# Allegro board ether_ex_board_v001_1211.brd
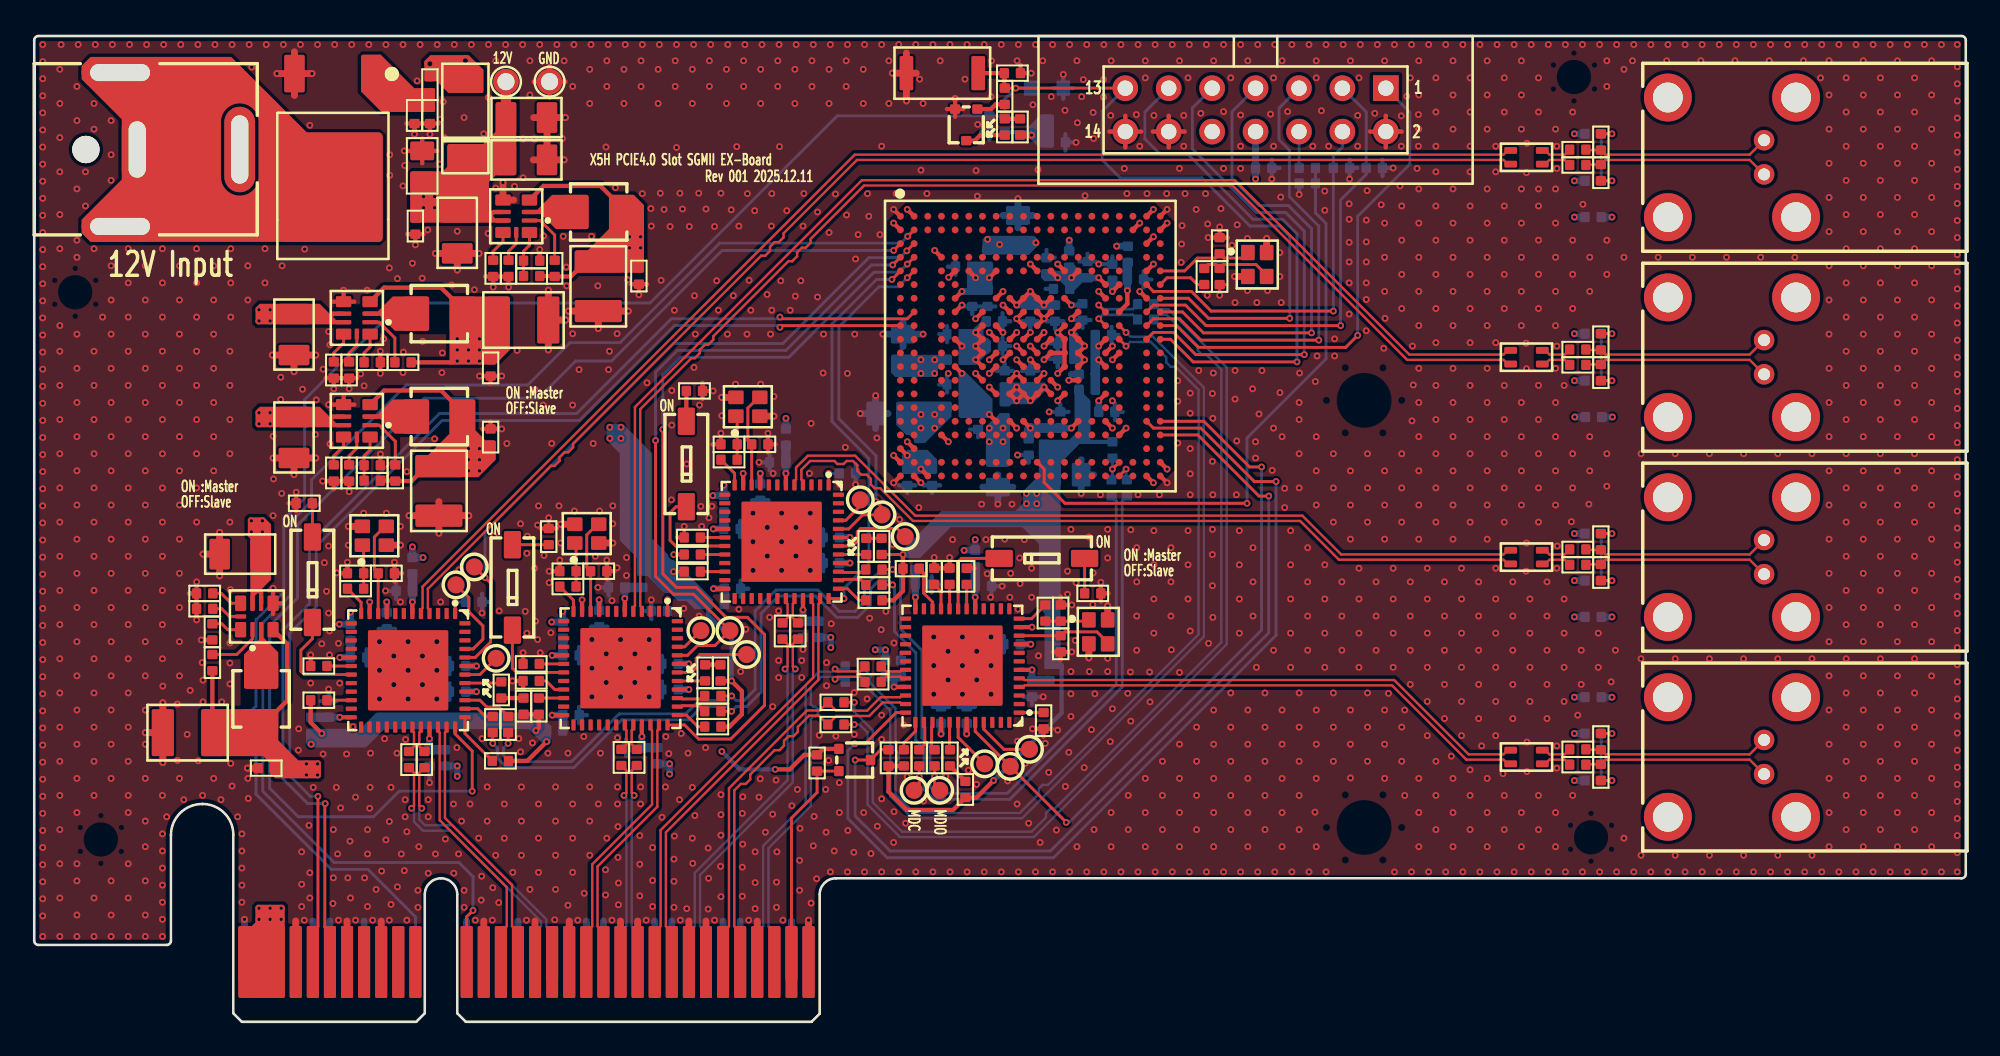
[diagram p0: board, top side]
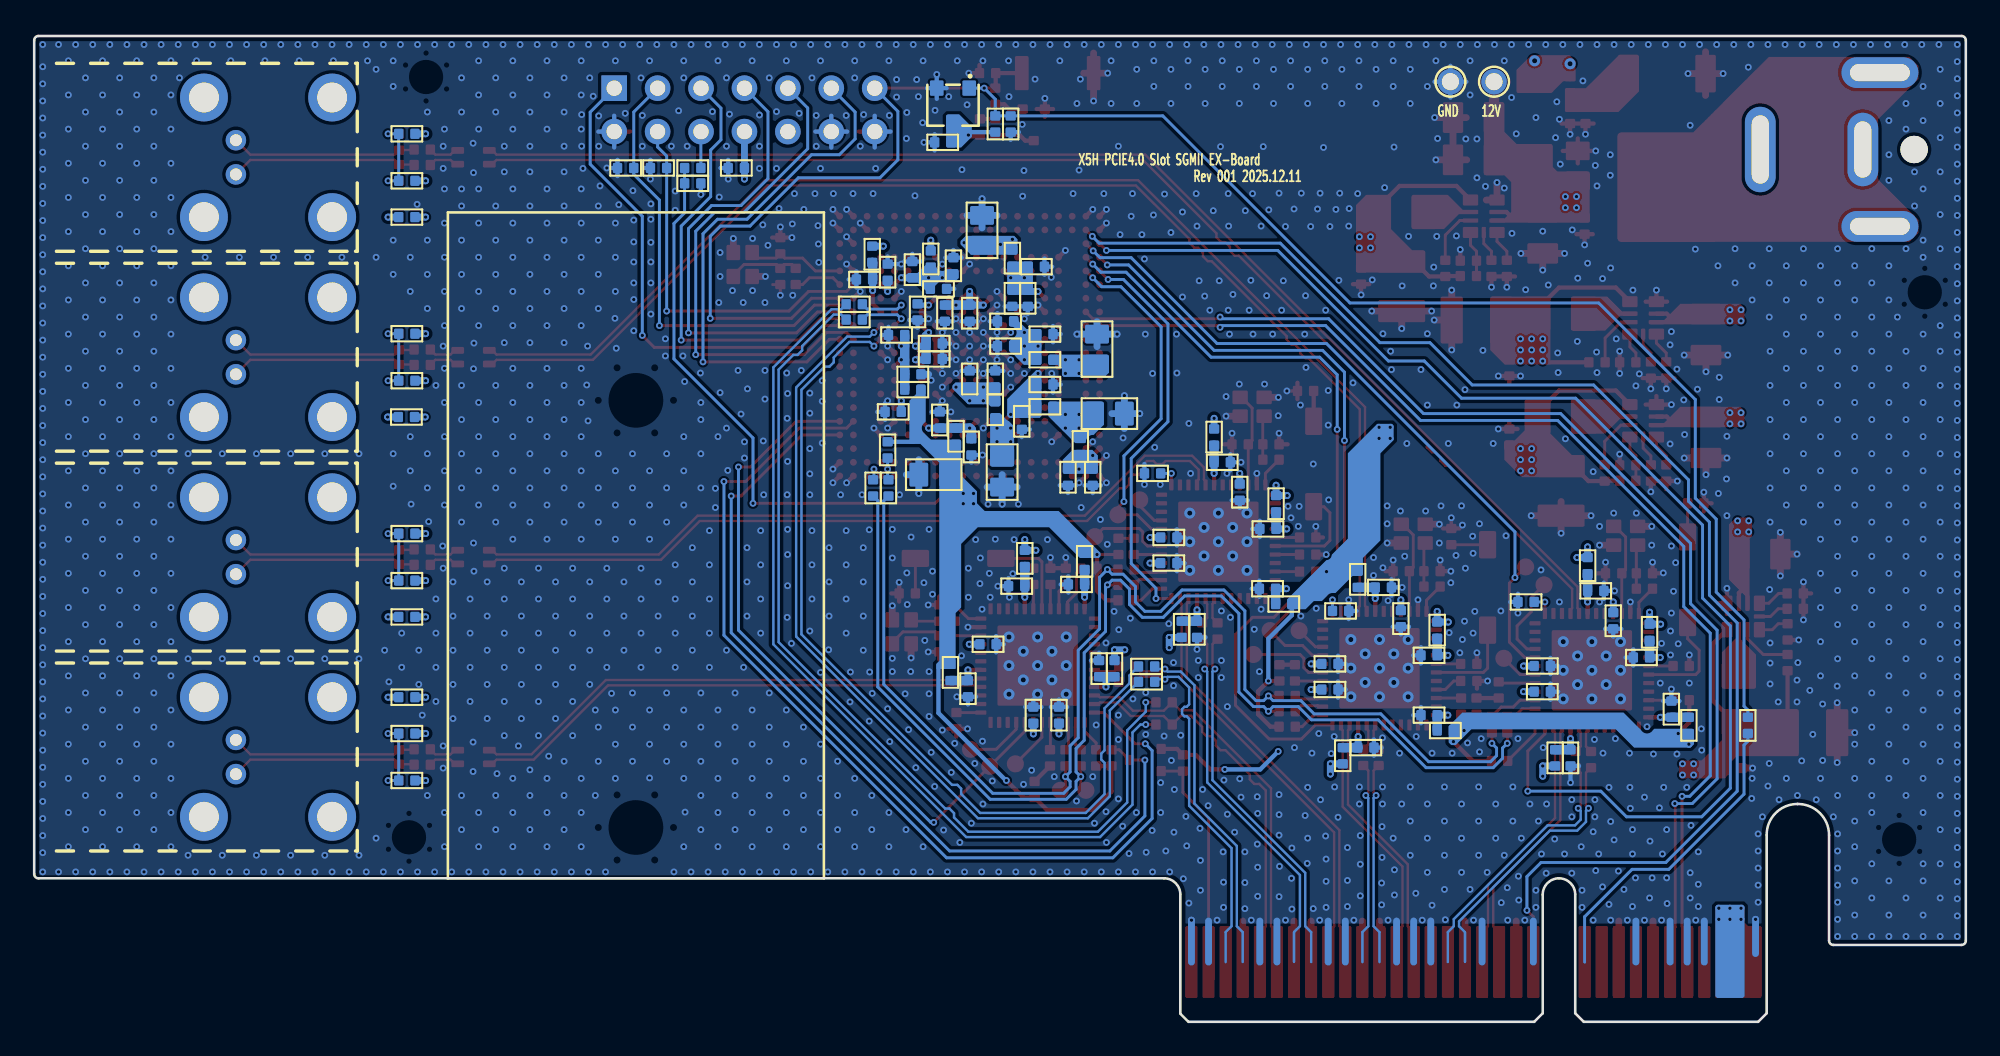
[diagram p1: board, bottom side, seen from below]

Outline 113 x 57.7 mm; copper layers: TOP, L2, L3, BOTTOM. Coordinates in mm from the lower left corner of the outline.
Outline path: 0,57.45 0,4.75 arc(0.07,4.57) 0.25,4.5 7.75,4.5 arc(7.93,4.57) 8,4.75 8,10.93 arc(8.53,12.22) 9.82,12.75 9.85,12.75 arc(11.12,12.22) 11.65,10.95 11.65,0.5 12.15,0 22.35,0 22.85,0.5 22.85,7.45 arc(23.13,8.12) 23.8,8.4 arc(24.47,8.12) 24.75,7.45 24.75,0.5 25.25,0 45.48,0 45.95,0.47 45.95,7.45 arc(46.23,8.12) 46.9,8.4 112.75,8.4 arc(112.93,8.47) 113,8.65 113,57.45 arc(112.93,57.63) 112.75,57.7 0.25,57.7 arc(0.07,57.63) 0,57.45

## Design rules (mm)
constraint set DEFAULT: min track width 0.17

## Placement (name value [footprint] x y rotation side)
B1  33  [CHIP1005]  53.88 38.75 0 bottom
B2  600  [CHIP1005]  60.55 44.65 90 bottom
B3  600  [CHIP1005]  53.88 36 180 bottom
B4  600  [CHIP1005]  59.08 34.27 270 bottom
B5  33  [CHIP1005]  56.77 35.83 90 bottom
B6  600  [CHIP1005]  55.77 44.7 90 bottom
B7  600  [CHIP1005]  61.6 37 180 bottom
B8  600  [CHIP1005]  51.8 33.67 90 bottom
B9  600  [CHIP1005]  22.12 26.7 270 bottom
B10  600  [CHIP1005]  24.02 15.45 270 bottom
B11  600  [CHIP1005]  16.2 17.35 90 bottom
B12  33  [CHIP1005]  18.5 22.8 90 bottom
B13  33  [CHIP1005]  91.2 47.1 180 bottom
B14  600  [CHIP1005]  35.58 25.9 270 bottom
B15  600  [CHIP1005]  36.45 15.57 270 bottom
B16  600  [CHIP1005]  30.45 17.05 0 bottom
B17  33  [CHIP1005]  30.93 22.93 90 bottom
B18  33  [CHIP1005]  91.22 35.4 180 bottom
B19  600  [CHIP1005]  43.98 34.23 270 bottom
B20  600  [CHIP1005]  45.88 22.98 270 bottom
B21  600  [CHIP1005]  39.9 24.45 0 bottom
B22  33  [CHIP1005]  40.35 30.32 90 bottom
B23  33  [CHIP1005]  91.2 23.7 180 bottom
B24  600  [CHIP1005]  59.4 20.45 270 bottom
B25  600  [CHIP1005]  49.8 20.68 90 bottom
B26  600  [CHIP1005]  51.55 26.95 270 bottom
B27  33  [CHIP1005]  55.05 27.12 90 bottom
B28  33  [CHIP1005]  91.2 19 180 bottom
B29  600  [CHIP1005]  63.98 44.92 90 bottom
C1  10uF  [CHIP2012]  50.83 39.38 270 bottom
C2  0.1uF  [CHIP1005]  58.27 41.48 270 bottom
C3  0.1uF  [CHIP1005]  56.17 39.55 0 bottom
C4  10uF  [CHIP2012]  50.1 35.6 0 bottom
C5  0.1uF  [CHIP1005]  59.73 41.48 270 bottom
C6  0.1uF  [CHIP1005]  53.88 40.25 180 bottom
C7  0.1uF  [CHIP1005]  56.17 41 0 bottom
C8  0.1uF  [CHIP1005]  53.88 37.3 180 bottom
C9  0.1uF  [CHIP1005]  55.23 35.15 270 bottom
C10  0.1uF  [CHIP1005]  61.62 44.02 90 bottom
C11  0.1uF  [CHIP1005]  60.1 42.9 180 bottom
C12  0.1uF  [CHIP1005]  59.23 44.25 90 bottom
C13  0.1uF  [CHIP1005]  58.17 33.65 270 bottom
C14  0.1uF  [CHIP1005]  60.02 35.23 90 bottom
C15  10uF  [CHIP2012]  57.55 46.33 270 bottom
C16  10uF  [CHIP2012]  56.38 32.17 90 bottom
C17  0.1uF  [CHIP1005]  60.35 38.8 180 bottom
C18  0.1uF  [CHIP1005]  58.27 37.62 90 bottom
C19  0.1uF  [CHIP1005]  56.77 37.62 90 bottom
C20  0.1uF  [CHIP1005]  54.38 44.2 180 bottom
C21  0.1uF  [CHIP1005]  55.77 42.35 270 bottom
C22  0.1uF  [CHIP1005]  54.88 42.35 270 bottom
C23  0.1uF  [CHIP1005]  62.75 35.7 0 bottom
C24  0.1uF  [CHIP1005]  60.35 39.7 180 bottom
C25  0.1uF  [CHIP1005]  64.42 43.45 0 bottom
C26  0.1uF  [CHIP1005]  61.6 37.9 180 bottom
C27  0.1uF  [CHIP1005]  62.55 40.2 0 bottom
C28  10uF  [CHIP2012]  60.38 32.02 180 bottom
C29  0.22uF  [CHIP1005]  61.33 41.55 90 bottom
C30  0.1uF  [CHIP1005]  51.08 31.88 270 bottom
C31  0.1uF  [CHIP1005]  52.52 31.88 270 bottom
C32  0.22uF  [CHIP1005]  63.08 43.88 270 bottom
C33  0.1uF  [CHIP1005]  71.92 49.98 0 bottom
C34  0.1uF  [CHIP1005]  65.03 42 180 bottom
C35  0.1uF  [CHIP1005]  65.03 41.1 180 bottom
C36  0.1uF  [CHIP1005]  57.23 55.52 0 top
C37  8pF  [CHIP1005]  69.35 45.42 270 top
C38  8pF  [CHIP1005]  69.35 43.62 90 top
C39  0.1uF  [CHIP1005]  21.65 25.23 180 bottom
C40  0.1uF  [CHIP1005]  23.12 15.45 270 bottom
C41  0.1uF  [CHIP1005]  20.62 23.48 270 bottom
C42  0.1uF  [CHIP1005]  24.77 19.32 180 bottom
C43  0.1uF  [CHIP1005]  17.23 18.3 90 bottom
C44  0.1uF  [CHIP1005]  18.98 21.32 0 bottom
C45  0.1uF  [CHIP1005]  24.77 20.82 180 bottom
C46  0.1uF  [CHIP1005]  22.82 15.35 90 top
C47  0.1uF  [CHIP1005]  90.3 50.15 0 top
C48  0.1uF  [CHIP1005]  21.93 15.35 90 top
C49  0.1uF  [CHIP1005]  90.3 51.05 0 top
C50  4.7nF  [CHIP1005]  91.2 49.23 180 bottom
C51  8pF  [CHIP1005]  18.8 26.25 0 top
C52  8pF  [CHIP1005]  20.6 26.25 180 top
C53  0.1uF  [CHIP1005]  34.08 25.43 180 bottom
C54  0.1uF  [CHIP1005]  35.1 16.05 180 bottom
C55  0.1uF  [CHIP1005]  37.2 19.45 180 bottom
C56  0.1uF  [CHIP1005]  33.05 23.6 270 bottom
C57  0.1uF  [CHIP1005]  31.4 17.95 0 bottom
C58  0.1uF  [CHIP1005]  31.4 21.45 0 bottom
C59  0.1uF  [CHIP1005]  37.2 20.95 180 bottom
C60  0.1uF  [CHIP1005]  35.25 15.47 90 top
C61  0.1uF  [CHIP1005]  34.35 15.47 90 top
C62  0.1uF  [CHIP1005]  90.3 38.45 0 top
C63  0.1uF  [CHIP1005]  90.3 39.35 0 top
C64  4.7nF  [CHIP1005]  91.2 37.52 180 bottom
C65  8pF  [CHIP1005]  31.23 26.38 0 top
C66  8pF  [CHIP1005]  33.02 26.38 180 top
C67  0.1uF  [CHIP1005]  43.5 32.75 180 bottom
C68  0.1uF  [CHIP1005]  44.98 22.98 270 bottom
C69  0.1uF  [CHIP1005]  42.48 31 270 bottom
C70  0.1uF  [CHIP1005]  40.85 25.35 0 bottom
C71  0.1uF  [CHIP1005]  46.62 26.85 180 bottom
C72  0.1uF  [CHIP1005]  40.83 28.85 0 bottom
C73  0.1uF  [CHIP1005]  46.62 28.35 180 bottom
C74  0.1uF  [CHIP1005]  44.67 22.88 90 top
C75  0.1uF  [CHIP1005]  43.77 22.88 90 top
C76  0.1uF  [CHIP1005]  90.3 26.75 0 top
C77  0.1uF  [CHIP1005]  90.3 27.65 0 top
C78  4.7nF  [CHIP1005]  91.2 28.57 180 bottom
C79  8pF  [CHIP1005]  40.65 33.8 0 top
C80  8pF  [CHIP1005]  42.45 33.8 180 top
C81  0.1uF  [CHIP1005]  58.38 19.5 270 bottom
C82  0.1uF  [CHIP1005]  50.7 20.68 90 bottom
C83  0.1uF  [CHIP1005]  57.2 22.1 180 bottom
C84  0.1uF  [CHIP1005]  52.02 25.6 0 bottom
C85  0.1uF  [CHIP1005]  53.05 17.95 90 bottom
C86  0.1uF  [CHIP1005]  55.52 25.5 0 bottom
C87  0.1uF  [CHIP1005]  54.55 17.95 90 bottom
C88  0.1uF  [CHIP1005]  49.08 19.9 0 top
C89  0.1uF  [CHIP1005]  90.3 15.05 0 top
C90  0.1uF  [CHIP1005]  49.08 20.8 0 top
C91  0.1uF  [CHIP1005]  90.3 15.95 0 top
C92  4.7nF  [CHIP1005]  91.2 14.12 180 bottom
C93  8pF  [CHIP1005]  60.05 23.93 270 top
C94  8pF  [CHIP1005]  60.05 22.12 90 top
C95  10uF  [CHIP3216]  28.8 52.92 0 top
C96  10uF  [CHIP3216]  28.8 50.45 0 top
C97  4.7uF  [CHIP2012]  22.7 50.1 90 top
C98  0.1uF  [CHIP1005]  22.3 46.58 270 top
C99  0.1uF  [CHIP1005]  22.25 53.05 270 top
C100  10uF  [CHIP3216]  15.2 40.23 270 top
C101  22uF  [CHIP3225]  28.62 41.08 0 top
C102  0.1uF  [CHIP1005]  26.7 38.27 270 top
C103  1nF*  [CHIP1005]  18.43 38.15 90 top
C104  10uF  [CHIP3216]  12.05 27.38 180 top
C105  22uF  [CHIP3225]  8.97 16.93 180 top
C106  0.1uF  [CHIP1005]  13.57 14.85 180 top
C107  1nF*  [CHIP1005]  9.97 24.18 0 top
C108  10uF  [CHIP3216]  24.75 46.17 270 top
C109  1nF  [CHIP1005]  27.75 44.1 90 top
C110  22uF  [CHIP3225]  33 43.05 270 top
C111  0.1uF  [CHIP1005]  35.38 43.65 270 top
C112  10uF  [CHIP3216]  15.2 34.2 270 top
C113  2.2nF  [CHIP1005]  18.43 32.12 90 top
C114  22uF  [CHIP3225]  23.68 31.07 270 top
C115  0.1uF  [CHIP1005]  26.7 34.23 90 top
C116  0.1uF  [CHIP1005]  59.85 51.48 0 bottom
CN1  Flash E1  [JTAG-E2_254H]  71.45 53.38 0 top
CN2  PCIE_X4_SLOT  [PCIEX4_CARD_FINGER]  8 4.5 0 top
CN3  E6S20A-40MT5-Z  [E6S20A-40MT5]  101.2 50.6 270 top
CN4  E6S20A-40MT5-Z  [E6S20A-40MT5]  101.2 38.9 270 top
CN5  E6S20A-40MT5-Z  [E6S20A-40MT5]  101.2 27.2 270 top
CN6  E6S20A-40MT5-Z  [E6S20A-40MT5]  101.2 15.5 270 top
CN7  -  [PJ-063AH]  6.03 51.06 180 top
D1  -  [PMEG3030EP]  25.23 52.88 90 top
L1  ACM2012H-900  [ACM2012H-900-2P-T03]  87.3 50.6 180 top
L2  ACM2012H-900  [ACM2012H-900-2P-T03]  87.3 38.9 180 top
L3  ACM2012H-900  [ACM2012H-900-2P-T03]  87.3 27.2 180 top
L4  ACM2012H-900  [ACM2012H-900-2P-T03]  87.3 15.5 180 top
L5  1.0uH  [IHLP1212BZ5A]  23.55 41.45 0 top
L6  1.0uH  [IHLP1212BZ5A]  13.28 19.05 270 top
L7  1.0uH  [IHLP1212BZ5A]  32.88 47.4 0 top
L8  1.0uH  [IHLP1212BZ5A]  23.55 35.42 0 top
LED1  Amber  [LED1005]  27.32 19.43 270 top
LED2  Amber  [LED1005]  39.25 20.43 90 top
LED3  Amber  [LED1005]  48.67 27.82 90 top
LED4  Amber  [LED1005]  53.58 15.45 270 top
LED5  Amber  [LED1005]  56.77 52.38 90 top
NOREF  -  []  11.65 -0.28 0 top
NOREF#2  -  []  -0.17 4.5 90 top
NOREF#3  -  []  24.75 -0.28 0 top
NOREF#4  -  []  23.8 0 90 top
NOREF#5  -  []  22.85 -0.08 0 top
NOREF#6  -  []  0 4.3 0 top
NOREF#7  -  []  45.95 7.25 0 top
NOREF#8  -  []  9.82 0 90 top
NOREF#9  -  []  47.17 0 90 top
NOREF#10  -  []  0 57.88 0 top
NOREF#11  -  []  8 -0.12 0 top
NOREF#12  -  []  113.2 8.4 90 top
Q1  -  [NX3008NBKW]  48 15.32 270 top
Q2  -  [IPD30N03S4L]  17.48 51.3 180 top
Q3  -  [NX3008NBKW]  54.52 52.5 180 top
R1  10K  [CHIP1005]  78.4 49.98 0 bottom
R2  10K  [CHIP1005]  56.77 52.55 90 bottom
R3  0*  [CHIP1005]  74.47 49.98 180 bottom
R4  4.7K  [CHIP1005]  63.08 33.48 270 bottom
R5  10K  [CHIP1005]  76.47 49.98 0 bottom
R6  10K  [CHIP1005]  74.47 49.08 180 bottom
R7  0  [CHIP1005]  68.45 43.62 270 top
R8  10K  [CHIP1005]  45.8 15.15 270 top
R9  10K  [CHIP1005]  49.98 15.45 90 top
R10  0  [CHIP1005]  27.73 17.4 270 top
R11  1K  [CHIP1005]  91.65 51.5 90 top
R12  1K  [CHIP1005]  91.65 49.7 270 top
R13  0  [CHIP1005]  26.82 17.4 270 top
R14  4.7K  [CHIP1005]  27.27 15.28 0 top
R15  100K  [CHIP1005]  91.2 51.98 180 bottom
R16  1K  [CHIP1005]  28.62 18.48 270 top
R17  4.7K  [CHIP1005]  16.65 18.82 0 top
R18  4.7K*  [CHIP1005]  16.65 20.82 0 top
R19  4.7K  [CHIP1005]  15.8 30.35 0 top
R20  0  [CHIP1005]  18.8 25.35 180 top
R21  4.99K  [CHIP1005]  25.73 24.57 0 bottom
R22  1K  [CHIP1005]  91.65 39.8 90 top
R23  1K  [CHIP1005]  91.65 38 270 top
R24  0  [CHIP1005]  39.7 19.07 0 top
R25  0  [CHIP1005]  39.7 18.18 0 top
R26  4.7K  [CHIP1005]  39.7 17.27 0 top
R27  100K  [CHIP1005]  91.2 40.27 180 bottom
R28  1K  [CHIP1005]  40.15 20.43 270 top
R29  4.7K  [CHIP1005]  29.52 18.48 90 top
R30  4.7K*  [CHIP1005]  29.07 20.95 0 top
R31  4.7K  [CHIP1005]  30.1 28.4 270 top
R32  4.7K  [CHIP1005]  29.07 19.95 0 top
R33  0  [CHIP1005]  31.23 25.48 180 top
R34  4.99K  [CHIP1005]  36.58 24.05 180 bottom
R35  1K  [CHIP1005]  91.65 28.1 90 top
R36  1K  [CHIP1005]  91.65 26.3 270 top
R37  0  [CHIP1005]  49.12 26.48 0 top
R38  0  [CHIP1005]  49.12 25.57 0 top
R39  4.7K  [CHIP1005]  49.12 24.68 0 top
R40  100K  [CHIP1005]  91.2 25.82 180 bottom
R41  1K  [CHIP1005]  49.58 27.82 270 top
R42  4.7K  [CHIP1005]  38.5 26.35 0 top
R43  4.7K*  [CHIP1005]  38.5 28.35 0 top
R44  4.7K  [CHIP1005]  38.62 36.92 180 top
R45  4.7K  [CHIP1005]  38.5 27.35 0 top
R46  0  [CHIP1005]  40.65 32.9 180 top
R47  4.99K  [CHIP1005]  47.58 32.1 0 bottom
R48  0  [CHIP1005]  52.67 15.45 270 top
R49  1K  [CHIP1005]  91.65 16.4 90 top
R50  1K  [CHIP1005]  91.65 14.6 270 top
R51  0  [CHIP1005]  51.77 15.45 270 top
R52  4.7K  [CHIP1005]  50.88 15.45 90 top
R53  1K  [CHIP1005]  54.48 13.6 270 top
R54  100K  [CHIP1005]  91.2 16.88 180 bottom
R55  4.7K  [CHIP1005]  51.3 26.52 0 top
R56  4.7K*  [CHIP1005]  54.55 26.07 270 top
R57  4.7K  [CHIP1005]  61.92 25.07 180 top
R58  4.7K  [CHIP1005]  53.55 26.07 270 top
R59  4.7K  [CHIP1005]  52.65 26.07 270 top
R60  0  [CHIP1005]  59.15 23.93 90 top
R61  4.99K  [CHIP1005]  59.05 17.62 270 top
R62  10K  [CHIP1005]  23.15 54.85 270 top
R63  47K  [CHIP1005]  23.15 53.05 270 top
R64  100.0K  [CHIP1005]  21.57 38.6 0 top
R65  40.2K  [CHIP1005]  17.52 38.15 90 top
R66  249.0K*  [CHIP1005]  19.77 38.6 0 top
R67  100.0K  [CHIP1005]  10.43 21.02 270 top
R68  40.2K  [CHIP1005]  9.97 25.07 0 top
R69  21.0K  [CHIP1005]  10.43 22.82 270 top
R70  82.0K  [CHIP1005]  29.1 43.65 180 top
R71  100.0K  [CHIP1005]  30.45 44.1 270 top
R72  7.15K  [CHIP1005]  26.85 44.1 90 top
R73  100.0K  [CHIP1005]  29.1 44.55 0 top
R74  49.9K  [CHIP1005]  19.77 31.68 180 top
R75  100.0K  [CHIP1005]  21.12 32.12 270 top
R76  7.15K  [CHIP1005]  17.52 32.12 90 top
R77  100.0K  [CHIP1005]  19.77 32.58 0 top
R78  1K  [CHIP1005]  57.67 52.38 270 top
R79  0  [CHIP1005]  56.77 54.17 90 top
R80  0  [CHIP1005]  63.02 31.25 270 bottom
R81  0  [CHIP1005]  63.92 31.25 270 bottom
R82  0*  [CHIP1005]  47.92 19.9 180 bottom
R83  0*  [CHIP1005]  47.92 20.8 180 bottom
R84  0*  [CHIP1005]  46.9 17.4 180 top
R85  0*  [CHIP1005]  46.9 18.7 180 top
R86  0*  [CHIP1005]  12.75 17.35 90 bottom
R87  100K*  [CHIP1005]  55.88 52.55 270 bottom
SW1  TACK  [SKRKAGE020]  53.12 55.52 180 top
SW2  -  [CHS-01A]  16.27 25.88 180 top
SW3  -  [CHS-01A]  27.98 25.43 180 top
SW4  -  [CHS-01A]  38.15 32.65 180 top
SW5  -  [CHS-01A]  58.95 27.12 90 top
TH1  TH  [TH100]  27.6 55.02 270 top
TH2  TH  [TH100]  30.15 55.02 270 top
TH3  TH  [MH_C560D320]  77.8 11.38 0 top
TH4  TH  [MH_C560D320]  77.8 36.38 0 top
TH5  TH  [MH_C350D200]  2.4 42.7 0 top
TH6  TH  [MH_C350D200]  3.9 10.68 0 top
TH7  TH  [MH_C350D200]  91.08 10.8 0 top
TH8  TH  [MH_C350D200]  90.08 55.3 0 top
TP1  TP  [TP100]  51.48 13.55 0 top
TP2  TP  [TP100]  52.98 13.55 0 top
TP3  TP  [TP100]  24.68 25.57 0 top
TP4  TP  [TP100]  27.02 21.27 0 top
TP5  TP  [TP100]  25.75 26.62 0 top
TP6  TP  [TP100]  39 22.9 90 top
TP7  TP  [TP100]  41.67 21.5 0 top
TP8  TP  [TP100]  40.7 22.9 90 top
TP9  TP  [TP100]  48.33 30.55 0 top
TP10  TP  [TP100]  50.95 28.4 0 top
TP11  TP  [TP100]  49.6 29.68 0 top
TP12  TP  [TP100]  57.1 14.95 0 top
TP13  TP  [TP100]  58.23 15.95 0 top
TP14  TP  [TP100]  55.6 15.1 0 top
U1  U2C_292P  [U2C8_292P_080P_040B]  58.27 39.55 0 top
U2  88Q2112  [88Q2112_48P]  21.88 20.57 180 top
U3  88Q2112  [88Q2112_48P]  34.3 20.7 180 top
U4  88Q2112  [88Q2112_48P]  43.73 28.1 180 top
U5  88Q2112  [88Q2112_48P]  54.3 20.85 90 top
U6  TPS62903  [TPS62903Q1]  18.88 41.2 180 top
U7  TPS62903  [TPS62903Q1]  13.03 23.73 90 top
U8  TPS62903  [TPS62903Q1]  28.2 47.15 180 top
U9  TPS62903  [TPS62903Q1]  18.88 35.17 180 top
U10  APX803S00  [APX810SR]  59.25 53.65 0 bottom
X1  20.000MHz  [XTAL4_CRS2016]  71.55 44.33 270 top
X2  25.000MHz  [XTAL4_CRS2016]  19.9 28.45 0 top
X3  25.000MHz  [XTAL4_CRS2016]  32.33 28.57 0 top
X4  25.000MHz  [XTAL4_CRS2016]  41.75 36 0 top
X5  25.000MHz  [XTAL4_CRS2016]  62.25 22.82 270 top

## Library data of the parts
B1-B29 = BEAD
C1-C116 = CAP NP
CN1 = Flash E1
CN2 = PCIE_X4_SLOT
CN3-CN6 = CONN 1x2P4SH
CN7 = CONN PJ-063AH
D1 = DIODE SBD
L1-L4 = IND CM2PA4P
L5-L8 = IND L
LED1-LED5 = LED
Q1 Q3 = MOS N ESD
Q2 = MOS NR
R1-R87 = RES R
SW1 = SW 2P
SW2-SW5 = SW1
TH1-TH8 = TH
TP1-TP14 = TP
U1 = U2C_292P
U2-U5 = 88Q2112_48p
U6-U9 = TPS62903-Q1
U10 = APX810SR
X1-X5 = XTAL 4P

## Footprints (pads in the part's own frame, mm; a bottom-side part is the same pattern mirrored in y, then rotated)
88Q2112_48P
  rrect 0.25x0.65 smd: 1(-2.75,-3.325) 2(-2.25,-3.325) 3(-1.75,-3.325) 4(-1.25,-3.325) 5(-0.75,-3.325) 6(-0.25,-3.325) 7(0.25,-3.325) 8(0.75,-3.325) 9(1.25,-3.325) 10(1.75,-3.325) 11(2.25,-3.325) 12(2.75,-3.325) 25(2.75,3.325) 26(2.25,3.325) 27(1.75,3.325) 28(1.25,3.325) 29(0.75,3.325) 30(0.25,3.325) 31(-0.25,3.325) 32(-0.75,3.325) 33(-1.25,3.325) 34(-1.75,3.325) 35(-2.25,3.325) 36(-2.75,3.325)
  rrect 0.65x0.25 smd: 13(3.325,-2.75) 14(3.325,-2.25) 15(3.325,-1.75) 16(3.325,-1.25) 17(3.325,-0.75) 18(3.325,-0.25) 19(3.325,0.25) 20(3.325,0.75) 21(3.325,1.25) 22(3.325,1.75) 23(3.325,2.25) 24(3.325,2.75) 37(-3.325,2.75) 38(-3.325,2.25) 39(-3.325,1.75) 40(-3.325,1.25) 41(-3.325,0.75) 42(-3.325,0.25) 43(-3.325,-0.25) 44(-3.325,-0.75) 45(-3.325,-1.25) 46(-3.325,-1.75) 47(-3.325,-2.25) 48(-3.325,-2.75)
  rrect 4.7x4.7 smd: 49(0,0)
ACM2012H-900-2P-T03
  rrect 0.75x0.4 smd: 1(-0.925,0.4) 2(-0.925,-0.4) 3(0.925,-0.4) 4(0.925,0.4)
APX810SR
  rrect 0.8x0.9 smd: 1(-0.95,-1) 2(0.95,-1) 3(0,1)
CHIP1005
  rrect 0.55x0.6 smd: 1(-0.475,0) 2(0.475,0)
CHIP2012
  rrect 1.1x1.4 smd: 1(-0.875,0) 2(0.875,0)
CHIP3216
  rrect 1.2x1.8 smd: 1(-1.2,0) 2(1.2,0)
CHIP3225
  rrect 1.3x2.75 smd: 1(-1.45,0) 2(1.45,0)
CHS-01A
  rrect 1x1.6 smd: 1(0,-2.5) 2(0,2.5)
E6S20A-40MT5
  round 1.2 hole 0.7: 1(1,0) 2(-1,0)
  round 2.8 hole 1.75: 3(3.5,1.87) 4(-3.5,1.87) 5(-3.5,-5.63) 6(3.5,-5.63)
IHLP1212BZ5A
  rrect 1.5x2 smd: 1(-1.2,0) 2(1.5,0)
IPD30N03S4L
  rrect 1.2x2.2 smd: 1(-2.25,-4.2) 3(2.25,-4.2)
  rrect 5.8x6.4 smd: 2(0,2.45)
JTAG-E2_254H
  rect 1.5x1.5 hole 0.9: 1(7.62,1.27)
  round 1.5 hole 0.9: 2(7.62,-1.27) 3(5.08,1.27) 4(5.08,-1.27) 5(2.54,1.27) 6(2.54,-1.27) 7(0,1.27) 8(0,-1.27) 9(-2.54,1.27) 10(-2.54,-1.27) 11(-5.08,1.27) 12(-5.08,-1.27) 13(-7.62,1.27) 14(-7.62,-1.27)
LED1005
  rrect 0.55x0.6 smd: 1(-0.475,0) 2(0.475,0)
MH_C350D200
  round 0 hole 0.3: 1(0,0)
MH_C560D320
  round 0 hole 0.4: 1(0,0)
NX3008NBKW
  rrect 0.6x0.55 smd: 1(-0.65,-0.925) 2(0.65,-0.925) 3(0,0.925)
PCIEX4_CARD_FINGER
  rrect 0.7x3.2 smd: A1(4.3,-0.5) B17(22.3,-0.5) B31(36.3,-0.5)
  rrect 0.7x4.2 smd: A2(5.3,-1) A3(6.3,-1) A4(7.3,-1) A5(8.3,-1) A6(9.3,-1) A7(10.3,-1) A8(11.3,-1) A9(12.3,-1) A10(13.3,-1) A11(14.3,-1) A12(17.3,-1) A13(18.3,-1) A14(19.3,-1) A15(20.3,-1) A16(21.3,-1) A17(22.3,-1) A18(23.3,-1) A19(24.3,-1) A20(25.3,-1) A21(26.3,-1) A22(27.3,-1) A23(28.3,-1) A24(29.3,-1) A25(30.3,-1) A26(31.3,-1) A27(32.3,-1) A28(33.3,-1) A29(34.3,-1) A30(35.3,-1) A31(36.3,-1) A32(37.3,-1) B1(4.3,-1) B2(5.3,-1) B3(6.3,-1) B4(7.3,-1) B5(8.3,-1) B6(9.3,-1) B7(10.3,-1) B8(11.3,-1) B9(12.3,-1) B10(13.3,-1) B11(14.3,-1) B12(17.3,-1) B13(18.3,-1) B14(19.3,-1) B15(20.3,-1) B16(21.3,-1) B18(23.3,-1) B19(24.3,-1) B20(25.3,-1) B21(26.3,-1) B22(27.3,-1) B23(28.3,-1) B24(29.3,-1) B25(30.3,-1) B26(31.3,-1) B27(32.3,-1) B28(33.3,-1) B29(34.3,-1) B30(35.3,-1) B32(37.3,-1)
PJ-063AH
  round 1.6 hole 1.6 unplated: (3,0)
  oval 1.8x5 hole 1x4: 1(-6,0)
  oval 1.8x4.3 hole 1x3.3: 2(0,0)
  oval 4.5x1.8 hole 3.5x1: 3(1,4.5) 4(1,-4.5)
PMEG3030EP
  rrect 1.4x2.1 smd: A(2.2,0) C(-2.2,0)
SKRKAGE020
  rrect 0.8x2 smd: 1(-2.1,0) 2(2.1,0)
TH100
  round 1.5 hole 1: 1(0,0)
TP100
  round 1 smd: 1(0,0)
TPS62903Q1
  rrect 0.9x0.25 smd: 1(-0.775,0.25) 2(-0.775,-0.25) 5(0.775,-0.25) 6(0.775,0.25)
  rrect 0.9x0.65 smd: 3(-0.775,-0.95) 4(0.775,-0.95) 7(0.775,0.95) 9(-0.775,0.95)
  rrect 0.25x0.65 smd: 8(0,0.95)
U2C8_292P_080P_040B
  round 0.4 smd: A1(-7.6,7.6) A2(-6.8,7.6) A3(-6,7.6) A4(-5.2,7.6) A5(-4.4,7.6) A6(-3.6,7.6) A7(-2.8,7.6) A8(-2,7.6) A9(-1.2,7.6) A10(-0.4,7.6) A11(0.4,7.6) A12(1.2,7.6) A13(2,7.6) A14(2.8,7.6) A15(3.6,7.6) A16(4.4,7.6) A17(5.2,7.6) A18(6,7.6) A19(6.8,7.6) A20(7.6,7.6) B1(-7.6,6.8) B2(-6.8,6.8) B3(-6,6.8) B4(-5.2,6.8) B5(-4.4,6.8) B6(-3.6,6.8) B7(-2.8,6.8) B8(-2,6.8) B9(-1.2,6.8) B10(-0.4,6.8) B11(0.4,6.8) B12(1.2,6.8) B13(2,6.8) B14(2.8,6.8) B15(3.6,6.8) B16(4.4,6.8) B17(5.2,6.8) B18(6,6.8) B19(6.8,6.8) B20(7.6,6.8) C1(-7.6,6) C2(-6.8,6) C19(6.8,6) C20(7.6,6) D1(-7.6,5.2) D2(-6.8,5.2) D4(-5.2,5.2) D5(-4.4,5.2) D6(-3.6,5.2) D7(-2.8,5.2) D8(-2,5.2) D9(-1.2,5.2) D10(-0.4,5.2) D11(0.4,5.2) D12(1.2,5.2) D13(2,5.2) D14(2.8,5.2) D15(3.6,5.2) D16(4.4,5.2) D17(5.2,5.2) D19(6.8,5.2) D20(7.6,5.2) E1(-7.6,4.4) E2(-6.8,4.4) E4(-5.2,4.4) E5(-4.4,4.4) E6(-3.6,4.4) E7(-2.8,4.4) E8(-2,4.4) E9(-1.2,4.4) E10(-0.4,4.4) E11(0.4,4.4) E12(1.2,4.4) E13(2,4.4) E14(2.8,4.4) E15(3.6,4.4) E16(4.4,4.4) E17(5.2,4.4) E19(6.8,4.4) E20(7.6,4.4) F1(-7.6,3.6) F2(-6.8,3.6) F4(-5.2,3.6) F5(-4.4,3.6) F16(4.4,3.6) F17(5.2,3.6) F19(6.8,3.6) F20(7.6,3.6) G1(-7.6,2.8) G2(-6.8,2.8) G4(-5.2,2.8) G5(-4.4,2.8) G8(-2,2.8) G9(-1.2,2.8) G10(-0.4,2.8) G11(0.4,2.8) G12(1.2,2.8) G13(2,2.8) G16(4.4,2.8) G17(5.2,2.8) G19(6.8,2.8) G20(7.6,2.8) H1(-7.6,2) H2(-6.8,2) H4(-5.2,2) H5(-4.4,2) H7(-2.8,2) H9(-1.2,2) H10(-0.4,2) H11(0.4,2) H12(1.2,2) H14(2.8,2) H16(4.4,2) H17(5.2,2) H19(6.8,2) H20(7.6,2) J1(-7.6,1.2) J2(-6.8,1.2) J4(-5.2,1.2) J5(-4.4,1.2) J7(-2.8,1.2) J8(-2,1.2) J10(-0.4,1.2) J11(0.4,1.2) J13(2,1.2) J14(2.8,1.2) J16(4.4,1.2) J17(5.2,1.2) J19(6.8,1.2) J20(7.6,1.2) K1(-7.6,0.4) K2(-6.8,0.4) K4(-5.2,0.4) K5(-4.4,0.4) K7(-2.8,0.4) K8(-2,0.4) K9(-1.2,0.4) K10(-0.4,0.4) K11(0.4,0.4) K12(1.2,0.4) K13(2,0.4) K14(2.8,0.4) K16(4.4,0.4) K17(5.2,0.4) K19(6.8,0.4) K20(7.6,0.4) L1(-7.6,-0.4) L2(-6.8,-0.4) L4(-5.2,-0.4) L5(-4.4,-0.4) L7(-2.8,-0.4) L8(-2,-0.4) L9(-1.2,-0.4) L10(-0.4,-0.4) L11(0.4,-0.4) L12(1.2,-0.4) L13(2,-0.4) L14(2.8,-0.4) L16(4.4,-0.4) L17(5.2,-0.4) L19(6.8,-0.4) L20(7.6,-0.4) M1(-7.6,-1.2) M2(-6.8,-1.2) M4(-5.2,-1.2) M5(-4.4,-1.2) M7(-2.8,-1.2) M8(-2,-1.2) M10(-0.4,-1.2) M11(0.4,-1.2) M13(2,-1.2) M14(2.8,-1.2) M16(4.4,-1.2) M17(5.2,-1.2) M19(6.8,-1.2) M20(7.6,-1.2) N1(-7.6,-2) N2(-6.8,-2) N4(-5.2,-2) N5(-4.4,-2) N7(-2.8,-2) N9(-1.2,-2) N10(-0.4,-2) N11(0.4,-2) N12(1.2,-2) N14(2.8,-2) N16(4.4,-2) N17(5.2,-2) N19(6.8,-2) N20(7.6,-2) P1(-7.6,-2.8) P2(-6.8,-2.8) P4(-5.2,-2.8) P5(-4.4,-2.8) P8(-2,-2.8) P9(-1.2,-2.8) P10(-0.4,-2.8) P11(0.4,-2.8) P12(1.2,-2.8) P13(2,-2.8) P16(4.4,-2.8) P17(5.2,-2.8) P19(6.8,-2.8) P20(7.6,-2.8) R1(-7.6,-3.6) R2(-6.8,-3.6) R4(-5.2,-3.6) R5(-4.4,-3.6) R16(4.4,-3.6) R17(5.2,-3.6) R19(6.8,-3.6) R20(7.6,-3.6) T1(-7.6,-4.4) T2(-6.8,-4.4) T4(-5.2,-4.4) T5(-4.4,-4.4) T6(-3.6,-4.4) T7(-2.8,-4.4) T8(-2,-4.4) T9(-1.2,-4.4) T10(-0.4,-4.4) T11(0.4,-4.4) T12(1.2,-4.4) T13(2,-4.4) T14(2.8,-4.4) T15(3.6,-4.4) T16(4.4,-4.4) T17(5.2,-4.4) T19(6.8,-4.4) T20(7.6,-4.4) U1(-7.6,-5.2) U2(-6.8,-5.2) U4(-5.2,-5.2) U5(-4.4,-5.2) U6(-3.6,-5.2) U7(-2.8,-5.2) U8(-2,-5.2) U9(-1.2,-5.2) U10(-0.4,-5.2) U11(0.4,-5.2) U12(1.2,-5.2) U13(2,-5.2) U14(2.8,-5.2) U15(3.6,-5.2) U16(4.4,-5.2) U17(5.2,-5.2) U19(6.8,-5.2) U20(7.6,-5.2) V1(-7.6,-6) V2(-6.8,-6) V19(6.8,-6) V20(7.6,-6) W1(-7.6,-6.8) W2(-6.8,-6.8) W3(-6,-6.8) W4(-5.2,-6.8) W5(-4.4,-6.8) W6(-3.6,-6.8) W7(-2.8,-6.8) W8(-2,-6.8) W9(-1.2,-6.8) W10(-0.4,-6.8) W11(0.4,-6.8) W12(1.2,-6.8) W13(2,-6.8) W14(2.8,-6.8) W15(3.6,-6.8) W16(4.4,-6.8) W17(5.2,-6.8) W18(6,-6.8) W19(6.8,-6.8) W20(7.6,-6.8) Y1(-7.6,-7.6) Y2(-6.8,-7.6) Y3(-6,-7.6) Y4(-5.2,-7.6) Y5(-4.4,-7.6) Y6(-3.6,-7.6) Y7(-2.8,-7.6) Y8(-2,-7.6) Y9(-1.2,-7.6) Y10(-0.4,-7.6) Y11(0.4,-7.6) Y12(1.2,-7.6) Y13(2,-7.6) Y14(2.8,-7.6) Y15(3.6,-7.6) Y16(4.4,-7.6) Y17(5.2,-7.6) Y18(6,-7.6) Y19(6.8,-7.6) Y20(7.6,-7.6)
XTAL4_CRS2016
  rrect 0.9x0.8 smd: 1(-0.7,-0.55) 2(0.7,-0.55) 3(0.7,0.55) 4(-0.7,0.55)

## Nets
12.0V: C95.1 C96.1 C97.1 C98.1 C100.1 C104.1 C108.1 C112.1 CN2.A2 CN2.A3 CN2.B1 CN2.B2 CN2.B3 D1.C(CATHODE) TH1.1(P1) U6.5 U6.6 U7.5 U7.6 U8.5 U8.6 U9.5 U9.6
A1VCC: B8.1 C30.1 C31.1 U1.V1 U1.Y3
D0.9V: B12.2 B17.2 B22.2 B27.2 C114.1 C115.1 L8.2(P2) R74.1 R75.2 U9.3(VOS)
D1.8V: B10.2 B15.2 B20.2 B25.2 C105.1 C106.1 L6.2(P2) Q1.1 R8.1 R67.2 U7.3(VOS)
D1.09V: B1.1 B5.1 C1.2 C16.2 C110.1 C111.1 L7.2(P2) R70.1 R71.2 U8.3(VOS)
D3.3V: B2.2 B3.2 B4.2 B6.2 B7.2 B8.2 B9.1 B11.1 B14.1 B16.1 B19.1 B21.1 B24.1 B26.1 B29.2 C4.2 C15.2 C28.2 C33.1 C101.1 C102.1 C116.1 CN1.8(VDD) L5.2(P2) R2.1 R4.1 R9.1 R14.2 R16.2 R17.1 R26.2 R28.2 R29.1 R39.2 R41.2 R42.1 R52.1 R53.2 R55.1 R64.2 R78.2 U6.3(VOS) U10.3(VCC)
GND: B13.2 B18.2 B23.2 B28.2 C1.1 C2.2 C3.2 C4.1 C5.2 C6.2 C7.2 C8.2 C9.2 C10.2 C11.2 C12.2 C13.2 C14.2 C15.1 C16.1 C17.2 C18.2 C19.2 C20.2 C21.2 C22.2 C23.2 C24.2 C25.2 C26.2 C27.2 C28.1 C29.1 C30.2 C31.2 C32.1 C33.2 C36.2 C37.1 C38.1 C39.2 C40.2 C41.2 C42.2 C43.2 C44.2 C45.2 C51.1 C52.1 C53.2 C54.2 C55.2 C56.2 C57.2 C58.2 C59.2 C65.1 C66.1 C67.2 C68.2 C69.2 C70.2 C71.2 C72.2 C73.2 C79.1 C80.1 C81.2 C82.2 C83.2 C84.2 C85.2 C86.2 C87.2 C93.1 C94.1 C95.2 C96.2 C97.2 C98.2 C99.2 C100.2 C101.2 C102.2 C103.1 C104.2 C105.2 C106.2 C107.1 C108.2 C109.1 C110.2 C111.2 C112.2 C113.1 C114.2 C115.2 C116.2 CN1.2 CN1.12 CN1.14 CN2.A1 CN2.A4 CN2.A5 CN2.A6 CN2.A8 CN2.A12 CN2.A15 CN2.A18 CN2.A19 CN2.A20 CN2.A23 CN2.A24 CN2.A27 CN2.A28 CN2.A31 CN2.A32 CN2.B4 CN2.B7 CN2.B9 CN2.B13 CN2.B16 CN2.B18 CN2.B21 CN2.B22 CN2.B25 CN2.B26 CN2.B29 CN2.B32 Q2.3(SOURCE) Q3.2(SOURCE) R1.2 R5.2 R6.2 R18.1 R19.1 R21.2 R30.1 R31.1 R32.1 R34.2 R43.1 R44.1 R45.1 R47.2 R56.1 R57.1 R58.1 R59.1 R61.2 R63.2 R65.1 R66.2 R68.1 R69.2 R72.1 R73.2 R76.1 R77.2 R87.2 SW1.2 TH2.1(P1) TH3.1(P1) TH4.1(P1) TH5.1(P1) TH6.1(P1) TH7.1(P1) TH8.1(P1) U1.A1 U1.A2 U1.A19 U1.A20 U1.B1 U1.B18 U1.B20 U1.C19 U1.D4 U1.E5 U1.E11 U1.E13 U1.E19 U1.G8 U1.G16 U1.G19 U1.H5 U1.H7 U1.H9 U1.H10 U1.H11 U1.H12 U1.H14 U1.J8 U1.J10 U1.J11 U1.J13 U1.K8 U1.K9 U1.K10 U1.K11 U1.K12 U1.K13 U1.L8 U1.L9 U1.L10 U1.L11 U1.L12 U1.L13 U1.L16 U1.L17 U1.M8 U1.M10 U1.M11 U1.M13 U1.N7 U1.N9 U1.N10 U1.N11 U1.N12 U1.N14 U1.P8 U1.P13 U1.T9 U1.T16 U1.U4 U1.U17 U1.V2 U1.W1 U1.W20 U1.Y1 U1.Y2 U1.Y19 U1.Y20 U2.11 U2.49 U3.11 U3.49 U4.11 U4.49 U5.11 U5.49 U6.4 U7.4 U8.4 U9.4 U10.2 X1.2 X1.4 X2.2 X2.4 X3.2 X3.4 X4.2 X4.4 X5.2 X5.4
PGND: CN7.2 CN7.3 CN7.4 Q2.2
PGND1: B13.1 C50.2 CN3.3 CN3.4 CN3.5 CN3.6 R15.2
PGND2: B18.1 C64.2 CN4.3 CN4.4 CN4.5 CN4.6 R27.2
PGND3: B23.1 C78.2 CN5.3 CN5.4 CN5.5 CN5.6 R40.2
PGND4: B28.1 C92.2 CN6.3 CN6.4 CN6.5 CN6.6 R54.2
VCC: B3.1 C8.1 C9.1 U1.M5 U1.T8
VDDP1: B1.2 C2.1 C3.1 C5.1 C6.1 C7.1 U1.G9 U1.G10 U1.G11 U1.G12 U1.J7 U1.K5 U1.K7 U1.L7 U1.M7
VDDP2: B5.2 C17.1 C18.1 C19.1 C23.1 C24.1 U1.J14 U1.K14 U1.L14 U1.M14 U1.P9(VDD_TH#P9) U1.P10 U1.P11 U1.P12 U1.P16
E0VCC: B4.1 C13.1 C14.1 U1.T10 U1.T14
E1VCC: B6.1 C20.1 C21.1 C22.1 U1.E6 U1.E8 U1.G5
ETH0BVCC: B7.1 C26.1 C27.1 U1.K16 U1.M16
ETH0PVCC: B29.1 C25.1 U1.H17
FLMD0: CN1.4 R5.1 U1.F19
FLMD1: R3.1 R6.1 U1.W11
I2C0_SCL_PCIE: CN2.B5 U1.J1
I2C0_SDA_PCIE: CN2.B6 U1.H2
MCU_MDC: R13.2 R25.2 R38.2 R51.2 R81.2 TP1.1
MCU_MDIO: R10.2 R24.2 R37.2 R48.2 R80.2 TP2.1
MCU_PHY1_RSTN: U1.C1 U2.36
MCU_PHY1_WAKE: TP5.1 U1.C2 U2.44
MCU_PHY2_RSTN: U1.D2 U3.36
MCU_PHY2_WAKE: TP8.1 U1.D1 U3.44
MCU_PHY3_RSTN: U1.E1 U4.36
MCU_PHY3_WAKE: TP11.1 U1.E2 U4.44
MCU_PHY4_RSTN: U1.T19 U5.36
MCU_PHY4_WAKE: TP12.1 U1.T20 U5.44
MCU_RX_DAT_N: R82.1 U1.J17
MCU_RX_DAT_P: R83.1 U1.K17
MCU_TX_DAT_N: C34.1 R84.1
MCU_TX_DAT_P: C35.1 R85.1
PCIE4_0_RX0_N: C46.1 CN2.A17
PCIE4_0_RX0_P: C48.1 CN2.A16
PCIE4_0_RX1_N: C60.1 CN2.A22
PCIE4_0_RX1_P: C61.1 CN2.A21
PCIE4_0_TX0_N: CN2.B15 U2.35
PCIE4_0_TX0_P: CN2.B14 U2.34
PCIE4_0_TX1_N: CN2.B20 U3.35
PCIE4_0_TX1_P: CN2.B19 U3.34
PCIE4_1_RX0_N: C74.1 CN2.A26
PCIE4_1_RX0_P: C75.1 CN2.A25
PCIE4_1_RX1_N: C88.1 CN2.A30 R82.2
PCIE4_1_RX1_P: C90.1 CN2.A29 R83.2
PCIE4_1_TX0_N: CN2.B24 U4.35
PCIE4_1_TX0_P: CN2.B23 U4.34
PCIE4_1_TX1_N: CN2.B28 R84.2 U5.35
PCIE4_1_TX1_P: CN2.B27 R85.2 U5.34
PCIE4_PRSNT_N_18: CN2.B31 Q1.2(SOURCE) R8.2
PCIE4_PRSNT_N_33: Q1.3 R9.2 U1.U20
PCIE40_CLKREQ_N_CN: CN2.B12 U1.B2
PHY1_RXD2: SW2.2(A2) U2.19
PHY2_RXD2: SW3.2(A2) U3.19
PHY3_RXD2: SW4.2(A2) U4.19
PHY4_RXD2: SW5.2(A2) U5.19
PRSNT2#: CN2.B17
RDY: CN1.11 U1.K20
RESET: C36.1 CN1.13 R2.2 R79.2 R86.2 R87.1 SW1.1 U1.G20 U10.1
SYSVCC: B2.1 C10.1 C11.1 C12.1 U1.E12 U1.E14 U1.F16
TCK: CN1.1 U1.J20
TDI: CN1.7 U1.H20
TDO: CN1.5 U1.J19
TMS: CN1.9 U1.K19
TRST: CN1.3 R1.1 U1.H19
VGS: C99.1 Q2.1 R62.2 R63.1
N13712279: C34.2 U1.H16
N13712333: C35.2 U1.J16
N13723640: C37.2 U1.E20 X1.1
N13723698: C38.2 R7.1 X1.3
N13725563: R7.2 U1.F20
N13752616: B9.2 C39.1 U2.6
N13752962: B11.2 C42.1 C43.1 U2.24 U2.40
N13757673: B10.1 C40.1 C41.1 U2.9 U2.33
N13758065: B12.1 C44.1 C45.1 U2.17 U2.43
N13764633: C50.1 R11.2 R12.2 R15.1
N13768715: C47.1 L1.1
N13768719: C49.1 L1.2
N13768723: C47.2 CN3.1 R12.1
N13768727: C49.2 CN3.2 R11.1
N13768751: L1.4 U2.4
N13768755: L1.3(OUT2) U2.5
N13841313: R19.2 SW2.1
N13907536: R21.1 U2.1
N13908311: C51.2 R20.1 X2.1
N13908323: R20.2 U2.12
N13908391: C52.2 U2.10(XTAL_OUT) X2.3
N14019476: C48.2 U2.31
N14019482: C46.2 U2.32
N14863994: L8.1 U9.2
N14864194: C113.2 U9.8
N14864198: R75.1 U9.1
N14864222: R74.2 R77.1 U9.9
N14864276: R76.2 U9.7
N14865717: L5.1 U6.2
N14865853: R64.1 U6.1
N14865915: R65.2 U6.7
N14866437: L6.1 U7.2
N14866573: R67.1 U7.1
N14866615: R69.1 U7.9
N14866635: R68.2 U7.7
N14869466: L7.1 U8.2
N14869666: C109.2 U8.8
N14869670: R71.1 U8.1
N14869698: R70.2 R73.1 U8.9
N14869752: R72.2 U8.7
N14871707: CN7.1 D1.A R62.1
N14920809: CN2.A11 R86.1
N14934403: CN1.6 R3.2
N15708059: C107.2 U7.8
N15708268: C103.2 U6.8
N15723104: C29.2 U1.G13
N15723331: C32.2 U1.F17
N15804615: R4.2 R80.1 U1.W17
N15812953: B14.2 C53.1 U3.6
N15812965: B15.1 C54.1 C56.1 U3.9 U3.33
N15813171: B16.2 C55.1 C57.1 U3.24 U3.40
N15813199: B17.1 C58.1 C59.1 U3.17 U3.43
N15813463: C60.2 U3.32
N15813467: L2.4 U3.4
N15813491: C62.1 L2.1
N15813495: C62.2 CN4.1 R23.1
N15813585: C61.2 U3.31
N15813589: L2.3(OUT2) U3.5
N15813593: C63.1 L2.2
N15813597: C63.2 CN4.2 R22.1
N15813759: C64.1 R22.2 R23.2 R27.1
N15814025: R30.2 U3.18
N15814165: C65.2 R33.1 X3.1
N15814177: R33.2 U3.12
N15814275: R34.1 U3.1
N15814287: C66.2 U3.10(XTAL_OUT) X3.3
N15818220: B19.2 C67.1 U4.6
N15818232: B20.1 C68.1 C69.1 U4.9 U4.33
N15818438: B21.2 C70.1 C71.1 U4.24 U4.40
N15818466: B22.1 C72.1 C73.1 U4.17 U4.43
N15818736: C74.2 U4.32
N15818740: L3.4 U4.4
N15818764: C76.1 L3.1
N15818768: C76.2 CN5.1 R36.1
N15818858: C75.2 U4.31
N15818862: L3.3(OUT2) U4.5
N15818866: C77.1 L3.2
N15818870: C77.2 CN5.2 R35.1
N15819032: C78.1 R35.2 R36.2 R40.1
N15819664: C79.2 R46.1 X4.1
N15819676: R46.2 U4.12
N15819872: R47.1 U4.1
N15819900: C80.2 U4.10(XTAL_OUT) X4.3
N15820170: B24.2 C81.1 U5.6
N15820182: B25.1 C82.1 C83.1 U5.9 U5.33
N15820398: B26.2 C84.1 C85.1 U5.24 U5.40
N15820422: B27.1 C86.1 C87.1 U5.17 U5.43
N15820680: C88.2 U5.32
N15820684: L4.4 U5.4
N15820708: C89.1 L4.1
N15820712: C89.2 CN6.1 R50.1
N15820802: C90.2 U5.31
N15820806: L4.3(OUT2) U5.5
N15820810: C91.1 L4.2
N15820814: C91.2 CN6.2 R49.1
N15820976: C92.1 R49.2 R50.2 R54.1
N15821382: C93.2 R60.1 X5.1
N15821394: R60.2 U5.12
N15821492: R61.1 U5.1
N15821504: C94.2 U5.10(XTAL_OUT) X5.3
N15876925: R24.1 U3.39
N15876963: R25.1 U3.38
N15877199: R26.1 U3.37
N15878857: LED2.1(CATHODE) U3.41
N15878861: LED2.2 R28.1
N15889738: R10.1 U2.39
N15889776: R13.1 U2.38
N15889904: R14.1 U2.37
N15890676: LED1.1(CATHODE) U2.41
N15890680: LED1.2 R16.1
N15890998: R37.1 U4.39
N15891036: R38.1 U4.38
N15891166: R39.1 U4.37
N15891671: LED3.1(CATHODE) U4.41
N15891675: LED3.2 R41.1
N15892157: R48.1 U5.39
N15892195: R51.1 U5.38
N15892325: R52.2 U5.37
N15892618: LED4.1(CATHODE) U5.41
N15892622: LED4.2 R53.1
N15893465: R17.2 U2.22
N15898773: R29.2 U3.22
N15901049: R18.2 U2.18
N15901801: R31.2 SW3.1
N15902204: R32.2 U3.21
N15903813: R42.2 U4.22
N15903821: R43.2 U4.18
N15903981: R55.2 U5.22
N15903989: R56.2 U5.18
N15904595: R45.2 U4.20
N15904719: R59.2 U5.21
N15904831: R58.2 U5.20
N15905664: R44.2 SW4.1
N15905885: R57.2 SW5.1
N15935905: R66.1 U6.9
N16037883: LED5.1(CATHODE) Q3.3
N16037887: LED5.2 R78.1
N16038991: Q3.1 R79.1
N16050014: R81.1 U1.Y17
N16050156: TP3.1 U2.45
N16050160: TP4.1 U2.42
N16050261: TP6.1 U3.45
N16050311: TP7.1 U3.42
N16050711: TP9.1 U4.45
N16050715: TP10.1 U4.42
N16050812: TP13.1 U5.45
N16050816: TP14.1 U5.42

Pads without a net: CN1 10; CN2 A7 A9 A10 A13 A14 B8 B10 B11 B30; U1 A3 A4 A5 A6 A7 A8 A9 A10 A11 A12 A13 A14 A15 A16 A17 A18 B3 B4 B5 B6 B7 B8 B9 B10 B11 B12 B13 B14 B15 B16 B17 B19 C20 D5 D6 D7 D8 D9 D10 D11 D12 D13 D14 D15 D16 D17 D19 D20 E4 E7 E9 E10 E15 E16 E17 F1 F2 F4 F5 G1 G2 G4 G17 H1 H4 J2 J4 J5 K1 K2 K4 L1 L2 L4 L5 L19 L20 M1 M2 M4 M17 M19 M20 N1 N2 N4 N5 N16 N17 N19 N20 P1 P2 P4 P5 P17 P19 P20 R1 R2 R4 R5 R16 R17 R19 R20 T1 T2 T4 T5 T6 T7 T11 T12 T13 T15 T17 U1 U2 U5 U6 U7 U8 U9 U10 U11 U12 U13 U14 U15 U16 U19 V19 V20 W2 W3 W4 W5 W6 W7 W8 W9 W10 W12 W13 W14 W15 W16 W18 W19 Y4 Y5 Y6 Y7 Y8 Y9 Y10 Y11 Y12 Y13 Y14 Y15 Y16 Y18; U2 2 3 7 8 13 14 15 16 20 21 23 25 26 27 28 29 30 46 47 48; U3 2 3 7 8 13 14 15 16 20 23 25 26 27 28 29 30 46 47 48; U4 2 3 7 8 13 14 15 16 21 23 25 26 27 28 29 30 46 47 48; U5 2 3 7 8 13 14 15 16 23 25 26 27 28 29 30 46 47 48

## Via types
v1: diameter 0.4, hole 0.2, TOP to BOTTOM, 2215 vias
v2: diameter 0.65, hole 0.3, TOP to BOTTOM, 54 vias

## Routing (per net, layer and track width the routed paths; a pad name or vN(x,y) marks a point on that pad's centre or on a via; arc(x,y) is an arc through that point)
12.0V: length 5.7
  TOP w0.25: 17.3,35.23 17.5,35.42 U9.5 ; 17.3,41.25 17.5,41.45 U6.5 ; U8.5 26.88,47.4 26.68,47.2 ; 13.07,25.3 13.28,25.1 U7.5
  TOP w0.6: TH1.1 C95.1 27.6,52.83
  vias: v1(12.7,29.32) v1(12.7,28.68) v1(13.15,41.67) v1(13.15,41.02) v1(13.15,35.65) v1(13.15,35) v1(13.15,6.65) v1(13.15,6) v1(13.35,29.32) v1(13.35,28.68) v1(13.8,41.67) v1(13.8,41.02) v1(13.8,35.65) v1(13.8,35) v1(13.8,6.65) v1(13.8,6) v1(14.45,6.65) v1(14.45,6) v1(22.77,48.3) v1(22.77,47.65) v1(23.43,48.3) v1(23.43,47.65)
A1VCC: length 1.1
  TOP w0.25: U1.Y3 v1(51.88,32.35) ; U1.V1 v1(51.08,33.15)
D0.9V: length 15.5
  TOP w0.25: L8.2 25.05,35.7 23.8,36.95 20.48,36.95 U9.3 ; C114.1 22.95,32.52 22.07,31.65 R75.2 21.1,31.68 R74.1
  BOTTOM w0.4: v1(30.93,24.02) B17.2 v1(30.27,23.4) ; v1(39.7,30.8) B22.2 v1(40.35,31.41) ; v1(54.4,27.6) B27.2 v1(55.05,28.23) ; v1(17.85,23.27) B12.2 v1(18.5,23.98)
  vias: v1(25.4,33.55) v1(25.4,32.9) v1(25.4,32.25) v1(26.05,33.55) v1(26.05,32.9) v1(26.05,32.25)
D1.8V: length 23.1
  TOP w0.25: Q1.1 46.15,15.97 R8.1 45.05,15.62 44.2,14.78 v1(43.35,14.78) ; L6.2 13.55,17.55 14.8,18.8 14.8,22.12 U7.3 ; R67.2 10.43,16.98
  BOTTOM w0.25: v1(43.35,14.78) 41.27,14.78 v1(40.23,15.82)
  BOTTOM w0.4: B20.2 v1(46.6,22.5) v1(46.6,21.9) ; B15.2 v1(37.17,15.1) v1(37.17,14.5) ; v1(49.2,21.77) v1(49.8,21.77) B25.2 ; B10.2 v1(24.75,14.97) v1(24.75,14.38)
  vias: v1(15.93,15.1) v1(15.93,14.45) v1(16.57,15.1) v1(16.57,14.45)
D1.09V: length 10.3
  TOP w0.25: 28.98,48.1 29.8,48.92 33.12,48.92 34.38,47.67 L7.2 ; C110.1 32.27,44.5 31.4,43.62 R71.2 30.43,43.65 R70.1
  vias: v1(34.83,45.95) v1(34.83,45.3) v1(35.48,45.95) v1(35.48,45.3) v1(51.88,38.75) v1(51.88,37.95) v1(52.67,38.75) v1(52.67,37.95) v1(55.88,34.75) v1(55.88,33.95) v1(56.67,34.75) v1(56.67,33.95)
D3.3V: length 69.2
  TOP w0.17: R41.2 v1(50.83,27.35)
  TOP w0.2: R42.1 v1(37.4,26.35)
  TOP w0.25: R39.2 50.27,24.68 50.83,25.23 R55.1 v1(50.83,27.35) ; v1(29.35,17.05) 29.52,17.23 R29.1 R16.2 ; R14.2 28.85,15.28 v1(29.98,16.4) ; R64.2 24.55,38.6 ; 16.18,18.82 16.18,17.52 v1(16.82,16.88) ; R52.1 R9.1 49.98,13.47 51.05,12.4 53.75,12.4 R53.2 55.12,13.12 v1(56.12,14.12) ; R26.2 40.67,17.27 41.4,18 41.4,19.35 v1(40.8,19.95) R28.2 ; U6.3 20.48,42.98 23.8,42.98 25.05,41.73 L5.2
  TOP w0.4: v1(58.35,51.9) R78.2
  L3 w0.4: v1(71.45,49.33) 63.3,49.33
  BOTTOM w0.25: B21.1 39.42,23.8 40.8,22.43 v1(40.8,19.95) ; 60.1,20.85 60.1,18.07 56.15,14.12 v1(56.12,14.12) ; R4.1 61.55,33.95 ; 56.77,52.08 58.27,52.08
  BOTTOM w0.4: v1(16.82,16.88) B11.1 v1(16.2,16.25) ; v1(29.98,16.4) 29.98,17.05 v1(29.35,17.05) ; B29.2 v1(63.33,45.4) ; v1(22.12,27.8) B9.1 v1(22.75,27.18) ; CN1.8 C33.1 v1(71.45,49.33) ; B2.2 v1(60.55,45.75) ; B19.1 v1(43.98,35.33)
  vias: v1(24.75,39.98) v1(24.75,39.33) v1(24.75,38.67) v1(25.4,39.98) v1(25.4,39.33) v1(25.4,38.67) v1(26.05,39.98) v1(26.05,39.33) v1(26.05,38.67) v1(33.67,34.8) v1(33.67,34.15) v1(34.33,34.8) v1(34.33,34.15) v1(51.88,35.55) v1(51.88,34.75) v1(52.67,35.55) v1(52.67,34.75) v1(55.77,45.8) v1(56.48,45.5) v1(58.05,30.93) v1(58.05,30.32) v1(58.6,45.6) v1(58.65,30.93) v1(58.65,30.32)
GND: length 402.6
  TOP w0.17: 69.8,43.15 C38.1 v1(69.35,42.52)
  TOP w0.2: R44.1 v1(39.72,36.92) ; R31.1 v1(30.1,29.5) ; R43.1 v1(38.02,29)
  TOP w0.25: 59.05,16.7 R61.2 ; R61.2 v1(58.4,17.15) ; R61.2 59.53,17.15 ; 29.62,28.88 R31.1 30.58,28.88 ; R65.1 v1(17.52,37.05) ; R65.1 C103.1 ; R65.1 17.05,37.67 ; 28.6,19.5 R32.1 v1(27.98,19.95) ; R45.1 v1(37.42,27.35) ; U1.E19 v1(65.47,44.35) ; R73.2 v1(29.57,45.2) ; 53.4,53.42 Q3.2 ; Q3.2 v1(53.88,54.05) ; Q3.2 53.88,52.97 ; Q3.2 54.35,53.42 ; C103.1 v1(18.43,37.05) ; C103.1 18.9,37.67 ; 33.5,25.9 C66.1 ; C66.1 33.95,26.38 ; C66.1 v1(33.5,27.02) ; 22.7,50.25 C97.2 ; C97.2 23.58,50.98 ; C97.2 v1(21.65,50.98) ; C97.2 22.7,51.7 ; CN1.14 63.83,53.03 ; CN1.14 64.76,52.1 ; CN1.14 63.83,51.18 ; CN1.14 62.9,52.1 ; U1.H11 v1(59.08,41.15) ; v1(59.08,41.15) U1.J11 ; v1(59.08,41.15) U1.H12 ; 57.08,35.15 v1(57.48,34.75) ; 42.92,33.32 42.92,33.8 ; 42.92,33.8 v1(42.92,34.45) ; 42.92,33.8 43.38,33.8 ; 16.18,20.82 v1(16.18,21.48) ; U1.B1 v1(50.27,46.75) ; U1.G16 v1(62.27,42.75) ; C98.2 v1(22.3,45.48) ; C98.2 22.78,46.1 ; C98.2 21.82,46.1 ; R72.1 C109.1 v1(27.75,43) ; R72.1 v1(26.85,43) ; R72.1 26.38,43.62 ; R57.1 62.85,25.07 ; R57.1 v1(62.4,25.73) ; R57.1 62.4,24.6 ; 26.7,37.35 C102.2 ; C102.2 v1(26.05,37.8) ; C102.2 27.18,37.8 ; C37.1 v1(69.35,46.52) ; C37.1 68.87,45.9 ; C37.1 69.83,45.9 ; v1(18.32,26.9) C51.1 17.88,26.25 ; U9.4 v1(17.23,36.12) ; U9.4 18.1,36.63 ; U9.4 18.73,36.12 ; U1.E11 v1(58.27,44.35) ; U6.4 v1(18.1,42.83) ; U6.4 17.47,42.15 ; U6.4 18.73,42.15 ; 57.08,39.15 v1(56.67,38.75) ; 30.15,54.1 TH2.1 ; TH2.1 29.22,55.02 ; TH2.1 30.15,55.95 ; TH2.1 31.08,55.02 ; 59.57,21.65 C94.1 ; C94.1 v1(60.7,21.65) ; C94.1 60.05,21.2 ; U1.K8 v1(55.88,40.35) ; 9.05,25.07 R68.1 ; R68.1 C107.1 v1(9.5,23.52) ; R68.1 9.5,25.55 ; U1.J10 v1(57.48,41.15) U1.H10 ; C111.2 v1(35.38,42.55) ; C111.2 34.9,43.17 ; C111.2 35.85,43.17 ; R43.1 37.61,28.35 ; U1.B20 v1(66.28,46.75) ; 79.07,51.18 CN1.2 ; CN1.2 79.07,53.03 ; CN1.2 80,52.1 ; CN1.2 78.14,52.1 ; U1.P8 v1(55.88,37.15) ; U1.K12 v1(59.08,39.55) ; v1(30.75,27.02) C65.1 30.27,26.38 ; v1(53.55,27.18) R58.1 R59.1 v1(52.65,27.18) ; U1.L8 v1(55.88,38.75) ; U1.P13 v1(59.88,36.35) ; 22.25,52.58 23.15,52.58 ; 22.25,52.58 v1(22.25,51.95) ; 22.25,52.58 21.77,52.58 ; 23.15,52.58 v1(23.15,51.95) ; 23.15,52.58 23.65,52.58 ; U2.11 v1(19.62,24.57) ; U5.11 v1(58.38,23.1) ; CN1.12 66.37,53.03 ; CN1.12 66.37,51.18 ; CN1.12 65.44,52.1 ; CN1.12 67.3,52.1 ; U1.Y19 v1(65.47,31.55) ; U1.G8 v1(56.67,42.75) ; U1.T16 v1(63.08,34.75) ; U1.J8 v1(56.67,40.35) ; U1.M10 v1(57.48,38.75) ; U1.N7 v1(55.08,37.95) ; U1.L13 U1.K13 v1(59.88,40.35) U1.J13 ; U1.L13 U1.L12 v1(59.08,38.75) ; U1.L13 U1.M13 v1(59.88,37.95) ; C52.1 21.53,26.25 ; C52.1 v1(21.07,26.9) ; C52.1 21.07,25.77 ; R30.1 v1(28.6,21.6) ; U1.N11 v1(59.08,37.95) ; 60.05,24.9 C93.1 v1(60.7,24.4) ; C115.2 v1(27.35,34.7) ; C115.2 26.22,34.7 ; C115.2 26.7,35.15 ; 13.97,23.87 U7.4 ; U7.4 14.48,24.5 ; U7.4 v1(13.97,25.38) ; R76.1 C113.1 v1(18.43,31.02) ; R76.1 v1(16.88,31.65) ; R76.1 17.52,31.18 ; 57.08,37.55 v1(57.48,37.95) U1.N10 ; U1.M8 v1(55.88,37.95) ; 39.67,33.8 C79.1 v1(40.17,34.45) ; U1.L11 v1(58.27,39.55) ; U1.W1 v1(50.27,33.15) ; U1.C19 v1(65.47,45.95) ; 53.9,43.98 U1.E5 v1(53.5,43.58) ; 53.08,34.35 v1(53.48,33.95) ; R77.2 v1(20.25,33.23) ; 39.1,37.4 R44.1 39.1,36.45 ; U1.W20 v1(66.28,32.35) ; v1(20.25,39.25) R66.2 20.25,38.1 ; 57.08,41.55 v1(56.67,41.95) ; 15.32,30.35 v1(15.32,31) ; 15.32,30.35 15.32,29.87 ; 15.32,30.35 14.87,30.35 ; 57.7,56 C36.2 v1(58.33,55.52) ; U1.Y2 v1(51.88,31.55) ; 53.08,44.75 v1(52.67,45.15) ; U1.A2 v1(51.08,47.55) ; U1.N12 v1(59.88,37.15) ; U1.L17 v1(63.08,38.75) ; U1.H5 v1(54.27,41.95) ; 57.08,39.95 v1(57.48,40.35) ; U1.E13 v1(59.88,44.35) ; U1.A1 v1(50.27,47.55) ; R69.2 v1(9.78,22.35) ; U1.G19 v1(64.67,42.75) ; U3.11 v1(32.05,24.7) ; U1.Y1 v1(50.27,31.55) ; U1.K11 v1(59.08,40.35) ; U1.B18 v1(64.67,46.75) ; U1.K10 v1(58.27,40.35) ; U1.Y20 v1(66.28,31.55) ; R56.1 55.02,26.55 ; 61.08,41.55 v1(60.67,41.15) ; U1.M11 v1(58.27,38.75) ; U1.A19 v1(65.47,47.55) ; U1.H7 v1(55.08,41.15) ; U1.L16 v1(63.08,39.55) ; U1.V2 v1(51.08,33.95) ; U1.A20 v1(66.28,47.55) ; U4.11 v1(41.48,32.1) ; U1.U17 v1(63.88,34.75) ; 61.08,37.55 v1(60.52,37.55) ; U1.L10 v1(57.48,39.55)
  TOP w0.4: C112.2 v1(15.2,32.02) ; C112.2 v1(13.97,33) ; C112.2 v1(16.48,33) ; C114.2 v1(25.43,29.62) ; C114.2 23.68,30.45 ; C114.2 v1(23.68,28.6) ; C114.2 v1(21.93,29.62) ; 72.1,45.02 v1(72.1,45.85) ; CN2.B16 29.3,5.9 ; 15.22,55.5 v1(14.2,55.5) ; 15.22,55.5 v1(16.25,55.5) ; 15.22,55.5 15.22,56.78 ; 15.22,55.5 15.22,54.22 ; C95.2 v1(31.07,52.92) ; C95.2 29.22,52.92 ; C95.2 C96.2 ; X1.2 v1(70.22,43.62) ; SW1.2 51.02,56.7 ; SW1.2 51.6,55.52 ; SW1.2 v1(50.2,55.52) ; SW1.2 v1(51.02,53.9) ; 33.02,28.02 v1(33.85,28.02) ; CN2.B7 18.3,5.9 ; CN2.B25 38.3,5.9 ; C105.2 v1(7.53,18.68) ; C105.2 v1(6.5,16.93) ; C105.2 v1(7.53,15.18) ; C104.2 v1(10.85,26.1) ; C104.2 v1(10.85,28.65) ; C104.2 v1(9.88,27.38) ; X2.4 v1(18.38,29) ; C96.2 v1(31,50.45) ; C96.2 29.2,50.45 ; CN2.B9 20.3,5.9 ; CN2.B26 39.3,5.9 ; CN2.B29 42.3,5.9 ; X5.4 v1(62.8,24.35) ; C100.2 v1(13.93,39.02) ; C100.2 v1(16.48,39.02) ; C100.2 v1(15.2,38.05) ; C101.2 v1(31.1,41.08) ; C101.2 v1(30.07,39.33) ; C101.2 v1(30.07,42.83) ; X4.2 v1(43.27,35.45) ; X4.4 v1(40.22,36.55) ; v1(27.43,49.12) U8.4 28.05,48.1 ; CN2.A32 v1(45.3,5.95) ; 24.75,44.98 v1(26.02,44.98) ; 24.75,44.98 v1(23.48,44.98) ; 24.75,44.98 v1(24.75,44) ; C106.2 v1(12.47,14.85) ; X5.2 v1(61.7,21.3) ; CN2.A18 31.3,5.9 ; CN2.A4 15.3,5.9 ; X2.2 v1(21.43,27.9) ; CN2.B22 35.3,5.9 ; CN2.B13 26.3,5.9 ; C110.2 v1(31.25,41.6) ; C110.2 v1(33,40.58) ; C110.2 v1(34.75,41.6) ; 31.62,29.12 v1(30.8,29.12) ; CN2.B21 34.3,5.9
  L2 w0.25: TH2.1 30.15,55.95 ; TH2.1 29.22,55.02 ; TH2.1 31.08,55.02 ; TH2.1 30.15,54.1 ; CN1.2 80,52.1 ; CN1.2 78.14,52.1 ; CN1.2 79.07,53.03 ; CN1.2 79.07,51.18 ; 65.44,52.1 CN1.12 ; CN1.12 66.37,51.18 ; CN1.12 67.3,52.1 ; CN1.12 66.37,53.03 ; CN1.14 64.76,52.1 ; CN1.14 62.9,52.1 ; CN1.14 63.83,53.03 ; CN1.14 63.83,51.18
  L3 w0.25: 78.14,52.1 CN1.2 ; CN1.2 79.07,53.03 ; CN1.2 79.07,51.18 ; CN1.2 80,52.1 ; 63.83,51.18 CN1.14 ; CN1.14 64.76,52.1 ; CN1.14 63.83,53.03 ; CN1.14 62.9,52.1 ; CN1.12 66.37,53.03 ; CN1.12 67.3,52.1 ; CN1.12 65.44,52.1 ; CN1.12 66.37,51.18 ; TH2.1 31.08,55.02 ; TH2.1 30.15,55.95 ; TH2.1 29.22,55.02 ; TH2.1 30.15,54.1
  L3 w0.4: v1(37.27,30.55) 36.92,30.2 ; v1(37.27,30.55) 37.6,30.23 ; v1(37.27,30.55) 37.27,30.3 ; 53.8,26.93 v1(53.55,27.18) 53.17,27.18 ; v1(21.07,26.9) 21.32,27.15 ; v1(21.07,26.9) 21.07,27.07 ; v1(21.07,26.9) 20.82,27.15 ; v1(52,40.25) 52.17,40.42 ; v1(52,40.25) 52,40.62 ; v1(52,40.25) 52.38,40.25 ; v1(23.12,14) 22.88,13.75 ; v1(23.12,14) 23.12,13.88 ; v1(23.12,14) 23.43,13.7 ; v1(37.3,34.92) 38.2,35.4
  BOTTOM w0.25: C18.2 58.75,38.1 ; C18.2 57.8,38.1 ; C18.2 58.27,38.55 ; 42.48,30.07 C69.2 ; C69.2 42,30.52 ; C69.2 42.95,30.52 ; 31.88,17.47 C57.2 ; C57.2 32.33,17.95 ; C57.2 31.88,18.43 ; 63.08,44.8 C32.1 v1(62.27,44.35) ; C8.2 53.4,37.88 v1(53.48,37.95) ; C8.2 53.4,36.82 ; C8.2 52.95,37.3 ; C58.2 31.88,21.93 ; C58.2 31.88,20.97 ; C58.2 32.33,21.45 ; R5.2 76.95,50.45 ; R5.2 v1(76.95,49.33) ; R5.2 77.4,49.98 ; C55.2 36.73,19.93 ; C55.2 36.27,19.45 ; C55.2 36.73,18.97 ; C33.2 72.85,49.98 ; C33.2 v1(72.4,49.33) ; C33.2 72.4,50.45 ; 33.05,22.67 C56.2 ; C56.2 32.57,23.12 ; C56.2 33.53,23.12 ; C31.2 53,31.4 ; C31.2 52.52,30.95 ; C31.2 52.05,31.4 ; C17.2 C24.2 ; C17.2 59.42,38.8 ; C17.2 59.88,38.32 ; C24.2 59.88,40.18 ; C24.2 59.42,39.7 ; CN1.14 63.83,53.03 ; CN1.14 63.83,51.18 ; CN1.14 62.9,52.1 ; C14.2 60.5,35.7 ; C14.2 v1(59.38,35.7) ; C14.2 60.02,36.15 ; C45.2 24.3,21.3 ; C45.2 24.3,20.35 ; C45.2 23.85,20.82 ; 56,25.02 C86.2 ; C86.2 v1(56.62,25.5) ; C86.2 56,25.98 ; 54.75,34.67 55.23,34.67 55.23,34.22 ; 58.17,32.73 58.17,33.17 v1(57.52,33.17) ; 51.18,21.15 C82.2 50.7,21.6 ; C23.2 63.23,36.2 v1(63.08,36.35) ; C23.2 63.23,35.22 ; C23.2 63.68,35.7 ; 52.57,18.43 C85.2 ; C85.2 53.53,18.43 ; C85.2 53.05,18.88 ; C43.2 17.7,18.77 ; C43.2 16.75,18.77 ; C43.2 v1(17.23,19.48) ; 35.65,24.05 R34.2 ; R34.2 v1(36.1,24.7) ; R34.2 36.1,23.57 ; C116.2 v1(60.95,51.48) ; C116.2 60.33,51 ; C116.2 60.33,51.95 ; 61.33,41.08 61.8,41.08 ; 61.33,41.08 60.85,41.08 ; 61.33,41.08 61.33,40.62 ; 59.62,54.65 U10.2 ; U10.2 60.2,54.02 ; U10.2 v1(60.2,55.45) ; U10.2 60.78,54.65 ; C19.2 56.77,38.55 ; C19.2 56.3,38.1 ; C19.2 57.25,38.1 ; 45.7,26.85 C71.2 ; C71.2 46.15,26.37 ; C71.2 46.15,27.33 ; 58.27,40.55 C2.2 ; C2.2 58.75,41 ; C2.2 57.8,41 ; C81.2 v1(59.02,19.02) ; C81.2 57.9,19.02 ; C81.2 58.38,18.57 ; 78.88,49.5 R1.2 ; R1.2 78.88,50.45 ; R1.2 v1(79.5,49.98) ; 23.85,19.32 C42.2 ; C42.2 24.3,19.8 ; C42.2 24.3,18.85 ; C27.2 63.44,40.2 ; C27.2 63.02,39.72 ; C27.2 63.02,40.68 ; 54.07,18.43 C87.2 ; C87.2 54.55,18.88 ; C87.2 55.03,18.43 ; C70.2 41.33,25.83 ; C70.2 41.78,25.35 ; C70.2 41.33,24.87 ; 41.3,28.37 C72.2 ; C72.2 41.75,28.85 ; C72.2 41.3,29.33 ; C83.2 56.73,22.58 ; C83.2 56.27,22.1 ; C83.2 56.73,21.62 ; 43.02,32.27 C67.2 ; C67.2 43.02,33.23 ; C67.2 v1(42.4,32.75) ; 53.9,43.72 C20.2 ; C20.2 53.45,44.2 ; C20.2 53.9,44.68 ; 19.45,20.85 C44.2 ; C44.2 19.9,21.32 ; C44.2 19.45,21.8 ; 59.73,40.55 C5.2 ; C5.2 59.25,41 ; C5.2 60.2,41 ; C7.2 56.65,41.48 ; C7.2 57.1,41 ; C7.2 56.65,40.52 ; 36.27,20.95 C59.2 ; C59.2 36.73,20.47 ; C59.2 36.73,21.43 ; C30.2 51.55,31.4 ; C30.2 50.6,31.4 ; C30.2 51.08,30.95 ; 54.4,41.88 C22.2 ; C22.2 54.88,41.42 ; C22.2 C21.2 56.23,41.88 ; 34.62,15.57 C54.2 ; C54.2 34.17,16.05 ; C54.2 34.62,16.53 ; 46.15,27.87 C73.2 ; C73.2 45.7,28.35 ; C73.2 46.15,28.83 ; v1(48.05,31.45) R47.2 48.05,32.65 ; v1(44.98,21.8) C68.2 44.48,22.5 ; C84.2 52.95,25.6 ; C84.2 52.5,25.12 ; C84.2 52.5,26.08 ; C25.2 65.35,43.45 ; C25.2 64.9,43.93 ; C25.2 64.9,42.97 ; CN1.12 67.3,52.1 ; CN1.12 65.44,52.1 ; CN1.12 66.37,53.03 ; CN1.12 66.37,51.18 ; C12.2 59.7,44.73 ; C12.2 58.75,44.73 ; C12.2 59.23,45.18 ; v1(23.12,14) C40.2 22.62,14.97 ; 53.4,39.77 C6.2 ; C6.2 53.4,40.73 ; C6.2 52.95,40.25 ; CN1.2 79.07,53.03 ; CN1.2 80,52.1 ; CN1.2 79.07,51.18 ; TH2.1 31.08,55.02 ; TH2.1 29.22,55.02 ; TH2.1 30.15,54.1 ; TH2.1 30.15,55.95 ; C3.2 56.65,40.03 ; C3.2 57.1,39.55 ; C3.2 56.65,39.07 ; 61.15,44.5 C10.2 ; C10.2 61.62,44.95 ; C10.2 62.1,44.5 ; 33.6,24.95 C53.2 ; C53.2 33.6,25.9 ; C53.2 v1(32.98,25.43) ; 20.15,23 C41.2 ; C41.2 20.62,22.55 ; C41.2 21.1,23 ; R21.2 26.65,24.57 ; R21.2 v1(26.2,23.93) ; R21.2 26.2,25.05 ; C11.2 59.17,42.9 ; 21.18,25.23 21.18,25.7 ; 21.18,25.23 21.18,24.75 ; 21.18,25.23 v1(20.55,25.23) ; R6.2 v1(74,48.42) ; 55.88,51.62 55.88,52.08 55.4,52.08
  BOTTOM w0.4: CN2.A31 44.3,5.9 ; CN2.A20 33.3,5.9 ; CN2.A15 28.3,5.9 ; C1.1 v1(52,40.25) ; C1.1 50.83,39.52 ; C1.1 50.83,40.98 ; C1.1 v1(49.65,40.25) ; CN2.A18 31.3,5.9 ; C4.1 49.95,35.6 ; C4.1 v1(48.33,35.6) ; C4.1 49.23,34.72 ; C4.1 v1(49.23,36.65) ; 90.72,47.1 v1(90.1,47.1) ; CN2.A5 16.3,5.9 ; C16.1 v1(56.38,30.3) ; C16.1 55.5,31.3 ; C16.1 57.25,31.3 ; C16.1 56.38,32.03 ; C15.1 57.55,46.47 ; C15.1 v1(57.55,48.17) ; C15.1 58.43,47.2 ; C15.1 56.67,47.2 ; CN2.A27 40.3,5.9 ; CN2.A1 v1(12.3,6) ; C28.1 61.98,32.02 ; C28.1 61.25,32.9 ; C28.1 v1(61.25,30.93) ; CN2.A12 25.3,5.9 ; CN2.A24 37.3,5.9 ; 90.72,19 v1(90.1,19) ; B18.2 v1(90.12,35.4) ; CN2.A23 36.3,5.9 ; CN2.A6 17.3,5.9 ; CN2.A19 32.3,5.9 ; CN2.A4 15.3,5.9 ; 90.72,23.7 v1(90.1,23.7) ; CN2.A28 41.3,5.9 ; C26.2 60.67,37.9 ; CN2.A32 v1(45.3,5.95) ; CN2.A8 19.3,5.9
  vias: v1(0.5,57.2) v1(0.5,56.2) v1(0.5,55.2) v1(0.5,54.2) v1(0.5,53.2) v1(0.5,52.2) v1(0.5,51.2) v1(0.5,50.2) v1(0.5,49.2) v1(0.5,48.2) v1(0.5,47.2) v1(0.5,46.2) v1(0.5,45.2) v1(0.5,44.2) v1(0.5,43.2) v1(0.5,42.2) v1(0.5,41.2) v1(0.5,40.2) v1(0.5,39.2) v1(0.5,38.2) v1(0.5,37.2) v1(0.5,36.2) v1(0.5,35.2) v1(0.5,34.2) v1(0.5,33.2) v1(0.5,32.2) v1(0.5,31.2) v1(0.5,30.2) v1(0.5,29.2) v1(0.5,28.2) v1(0.5,27.2) v1(0.5,26.2) v1(0.5,25.2) v1(0.5,24.2) v1(0.5,23.2) v1(0.5,22.2) v1(0.5,21.2) v1(0.5,20.2) v1(0.5,19.2) v1(0.5,18.2) v1(0.5,17.2) v1(0.5,16.2) v1(0.5,15.2) v1(0.5,14.2) v1(0.5,13.2) v1(0.5,12.2) v1(0.5,11.2) v1(0.5,10.2) v1(0.5,9.2) v1(0.5,8.2) v1(0.5,7.2) v1(0.5,6.2) v1(0.5,5) v1(1.5,55.75) v1(1.5,53.75) v1(1.5,51.75) v1(1.5,49.75) v1(1.5,47.25) v1(1.5,45.25) v1(1.5,40.75) v1(1.5,39.25) v1(1.5,37.25) v1(1.5,35.25) v1(1.5,33.25) v1(1.5,31.25) v1(1.5,29.25) v1(1.5,27.25) v1(1.5,25.25) v1(1.5,23.25) v1(1.5,21.25) v1(1.5,19.25) v1(1.5,17.25) v1(1.5,15.25) v1(1.5,13.25) v1(1.5,11.25) v1(1.5,9.25) v1(1.5,7.25) v1(1.5,5) v1(1.57,57.2) v1(2.5,54.75) v1(2.5,52.75) v1(2.5,48.75) v1(2.5,45.75) v1(2.5,44.75) v1(2.5,40.25) v1(2.5,38.25) v1(2.5,36.25) v1(2.5,34.25) v1(2.5,32.25) v1(2.5,30.25) v1(2.5,28.25) v1(2.5,26.25) v1(2.5,24.25) v1(2.5,22.25) v1(2.5,20.25) v1(2.5,18.25) v1(2.5,16.25) v1(2.5,14.25) v1(2.5,12.25) v1(2.5,9.25) v1(2.5,8.25) v1(2.5,6.25) v1(2.5,5) v1(2.58,57.2) v1(3,49.75) v1(3,47.75) v1(3.5,53.75) v1(3.5,52.25) v1(3.5,45.25) v1(3.5,39.25) v1(3.5,37.25) v1(3.5,35.25) v1(3.5,33.25) v1(3.5,31.25) v1(3.5,29.25) v1(3.5,27.25) v1(3.5,25.25) v1(3.5,23.25) v1(3.5,21.25) v1(3.5,19.25) v1(3.5,17.25) v1(3.5,15.25) v1(3.5,13.25) v1(3.5,7.25) v1(3.5,5) v1(3.58,57.2) v1(4,41.25) v1(4.5,52.75) v1(4.5,50.75) v1(4.5,49.25) v1(4.5,44.25) v1(4.5,42.25) v1(4.5,40.25) v1(4.5,38.25) v1(4.5,36.25) v1(4.5,34.25) v1(4.5,32.25) v1(4.5,30.25) v1(4.5,28.25) v1(4.5,26.25) v1(4.5,24.25) v1(4.5,22.25) v1(4.5,20.25) v1(4.5,18.25) v1(4.5,16.25) v1(4.5,14.25) v1(4.5,8.25) v1(4.5,6.25) v1(4.5,5) v1(4.58,57.2) v1(5.5,45.25) v1(5.5,43.25) v1(5.5,41.25) v1(5.5,39.25) v1(5.5,37.25) v1(5.5,35.25) v1(5.5,33.25) v1(5.5,31.25) v1(5.5,29.25) v1(5.5,27.25) v1(5.5,25.25) v1(5.5,23.25) v1(5.5,21.25) v1(5.5,19.25) v1(5.5,17.25) v1(5.5,15.25) v1(5.5,13.25) v1(5.5,12.25) v1(5.5,9.25) v1(5.5,7.25) v1(5.5,5) v1(5.58,57.2) v1(6.5,44.25) v1(6.5,42.25) v1(6.5,40.25) v1(6.5,38.25) v1(6.5,36.25) v1(6.5,34.25) v1(6.5,32.25) v1(6.5,30.25) v1(6.5,28.25) v1(6.5,26.25) v1(6.5,24.25) v1(6.5,22.25) v1(6.5,20.25) v1(6.5,18.25) v1(6.5,16.25) v1(6.5,14.25) v1(6.5,11.75) v1(6.5,10.25) v1(6.5,8.25) v1(6.5,6.25) v1(6.5,5) v1(6.58,57.2) v1(7.5,45.25) v1(7.5,43.25) v1(7.5,41.25) v1(7.5,39.25) v1(7.5,37.25) v1(7.5,35.25) v1(7.5,33.25) v1(7.5,31.25) v1(7.5,29.25) v1(7.5,27.25) v1(7.5,25.25) v1(7.5,23.25) v1(7.5,21.25) v1(7.53,19.65) v1(7.5,13.25) v1(7.5,11) v1(7.5,10) v1(7.5,9) v1(7.5,8) v1(7.5,7) v1(7.5,6) v1(7.5,5) v1(7.58,57.2) v1(7.75,12) v1(8.38,18.6) v1(8.38,15.3) v1(8.5,44.25) v1(8.5,42.25) v1(8.5,40.25) v1(8.5,38.25) v1(8.5,36.25) v1(8.5,34.25) v1(8.5,32.25) v1(8.5,30.25) v1(8.5,28.25) v1(8.5,26.25) v1(8.5,24.25) v1(8.5,22.25) v1(8.5,20.25) v1(8.5,14.25) v1(8.57,57.2) v1(8.75,13) v1(8.95,16.82) v1(9.12,19.4) v1(9.5,45.25) v1(9.5,43.25) v1(9.5,41.25) v1(9.5,39.25) v1(9.5,37.25) v1(9.5,35.25) v1(9.5,33.25) v1(9.5,31.25) v1(9.5,29.25) v1(9.5,25.75) v1(9.57,57.2) v1(9.6,15.28) v1(9.82,21.02) v1(9.85,13.25) v1(9.88,20) v1(9.88,18.73) v1(10.5,44.25) v1(10.5,42.25) v1(10.5,40.25) v1(10.5,38.25) v1(10.5,36.25) v1(10.5,34.25) v1(10.5,32.25) v1(10.5,30.25) v1(10.5,14.25) v1(10.57,57.2) v1(10.93,13) v1(10.97,18.73) v1(11.45,39.25) v1(11.45,37.25) v1(11.45,35.25) v1(11.45,33.25) v1(11.45,31.25) v1(11.45,29.25) v1(11.45,22.18) v1(11.45,21) v1(11.45,19.77) v1(11.5,45.25) v1(11.5,43.25) v1(11.5,41.25) v1(11.47,25.3) v1(11.5,15.12) v1(11.57,57.2) v1(11.57,13.8) v1(11.9,12) v1(12.15,11) v1(12.15,10) v1(12.15,9) v1(12.15,8) v1(12.15,7) v1(12.5,44.25) v1(12.5,42.25) v1(12.5,14.25) v1(12.53,13.07) v1(12.57,57.2) v1(12.72,55.88) v1(13.5,45.25) v1(13.5,43.25) v1(13.57,57.2) v1(13.97,34.27) v1(14,31.77) v1(13.97,29.62) v1(14.43,37.73) v1(14.43,36.42) v1(14.5,44.25) v1(14.47,30.93) v1(14.57,57.2) v1(15.45,15.9) v1(15.47,17.15) v1(15.57,57.2) v1(15.7,37.02) v1(15.65,9.95) v1(15.65,8.05) v1(15.65,6.75) v1(15.82,45.23) v1(15.8,5.95) v1(16.12,52.48) v1(16.07,11.5) v1(16.12,8.72) v1(16.12,7.25) v1(16.18,19.82) v1(16.32,13.72) v1(16.45,34.38) v1(16.5,36.4) v1(16.57,57.2) v1(16.82,22.12) v1(16.9,38.2) v1(16.9,15.68) v1(16.98,26.88) v1(17.1,25.2) v1(17.23,40.4) v1(17.23,27.85) v1(17.23,23.93) v1(17.3,39.62) v1(17.3,33.83) v1(17.27,22.88) v1(17.27,21.48) v1(17.5,11.25) v1(17.5,8.43) v1(17.48,6.92) v1(17.57,57.2) v1(17.7,26.27) v1(17.68,13.72) v1(17.8,22.15) v1(17.75,9.82) v1(17.8,5.95) v1(17.88,19.82) v1(17.93,12.53) v1(18.27,15.68) v1(18.38,27.9) v1(18.35,8.43) v1(18.48,10.57) v1(18.5,7.25) v1(18.57,57.2) v1(18.65,17.27) v1(18.8,13.15) v1(18.8,5.95) v1(19.1,37.92) v1(19.3,37.23) v1(19.27,29.77) v1(19.32,8.43) v1(19.48,42.83) v1(19.5,11.25) v1(19.5,9.82) v1(19.5,6.75) v1(19.57,57.2) v1(19.65,13.72) v1(19.62,12.5) v1(19.68,15.72) v1(19.8,5.95) v1(20,7.75) v1(20.25,37.95) v1(20.32,8.82) v1(20.45,39.98) v1(20.5,16.57) v1(20.57,57.2) v1(20.6,29.77) v1(20.57,10.65) v1(20.8,50.75) v1(20.8,49.55) v1(20.77,44.12) v1(20.77,11.72) v1(20.77,5.95) v1(20.88,13.72) v1(20.88,6.88) v1(21.25,43.5) v1(21.23,15.72) v1(21.25,7.9) v1(21.43,29) v1(21.43,24.57) v1(21.48,9.82) v1(21.57,57.2) v1(21.57,48.92) v1(21.6,39.2) v1(21.57,38) v1(21.65,8.85) v1(21.68,50.12) v1(21.73,16.52) v1(21.7,13) v1(21.7,12) v1(21.8,32.2) v1(21.8,11.12) v1(21.8,5.95) v1(22.12,44.4) v1(22.4,55.08) v1(22.45,7.7) v1(22.45,6.7) v1(22.5,10.25) v1(22.57,57.2) v1(22.7,43.52) v1(22.73,39.83) v1(23.02,46.35) v1(23.05,13) v1(23.05,12) v1(23.05,8.7) v1(23.43,34.12) v1(23.48,9.82) v1(23.57,57.2) v1(23.73,50.2) v1(23.77,52.83) v1(23.77,24.57) v1(23.93,53.85) v1(23.88,39.15) v1(23.85,38) v1(24,51.75) v1(24.05,10.7) v1(24.43,43.12) v1(24.52,12.75) v1(24.57,57.2) v1(24.55,8.7) v1(24.73,16.05) v1(24.75,46.27) v1(24.82,9.82) v1(24.85,26.45) v1(25,11.75) v1(25.15,52.92) v1(25.15,7.7) v1(25.15,6.7) v1(25.5,12.75) v1(25.57,57.2) v1(25.75,42.85) v1(25.8,5.95) v1(26,10.75) v1(26.15,7.12) v1(26.2,16.57) v1(26.18,8.53) v1(26.3,51.98) v1(26.5,13.75) v1(26.5,11.75) v1(26.57,57.2) v1(26.57,54.1) v1(26.55,46.15) v1(26.82,7.85) v1(26.8,5.95) v1(26.9,28.45) v1(27,56.25) v1(27,48.8) v1(27,9.75) v1(27.2,24.05) v1(27.18,6.97) v1(27.35,37.8) v1(27.5,12.75) v1(27.5,10.75) v1(27.57,57.2) v1(27.65,33.85) v1(28,8.75) v1(28.1,48.9) v1(28.25,39.3) v1(28.45,29.15) v1(28.35,16.57) v1(28.45,15.8) v1(28.5,13.75) v1(28.5,11.75) v1(28.5,9.75) v1(28.57,57.2) v1(28.6,51.67) v1(28.6,49.4) v1(28.73,24.02) v1(28.82,27.43) v1(28.82,22.75) v1(28.8,5.95) v1(28.85,28.43) v1(29,56.25) v1(29,54.25) v1(29,7.75) v1(29.15,16.32) v1(29.25,51.67) v1(29.3,37) v1(29.27,26.55) v1(29.32,23.45) v1(29.45,29.07) v1(29.45,22.38) v1(29.5,30.2) v1(29.5,12.75) v1(29.5,10.75) v1(29.5,8.75) v1(29.57,57.2) v1(29.6,21.6) v1(29.8,46) v1(29.77,36.1) v1(29.82,27.3) v1(30.12,26.38) v1(30.12,25.7) v1(30.05,15.72) v1(30.23,22.77) v1(30.27,33.85) v1(30.45,5.97) v1(30.5,13.75) v1(30.5,11.75) v1(30.5,9.75) v1(30.5,7.75) v1(30.57,57.2) v1(30.7,30.2) v1(30.8,28.02) v1(30.9,51.7) v1(30.95,45.98) v1(31,56.25) v1(31.12,44.17) v1(31.15,43.08) v1(31.23,15.72) v1(31.23,6.83) v1(31.5,54.75) v1(31.5,40.27) v1(31.5,36.1) v1(31.5,12.75) v1(31.5,10.75) v1(31.5,8.75) v1(31.57,57.2) v1(31.6,29.9) v1(31.8,5.95) v1(31.88,38.17) v1(32.15,16.7) v1(32.17,7.53) v1(32.5,55.75) v1(32.5,53.75) v1(32.5,13.75) v1(32.5,11.75) v1(32.5,9.75) v1(32.58,57.2) v1(32.6,45.98) v1(32.7,33.85) v1(32.83,27.25) v1(32.98,43.08) v1(33,12.75) v1(33.08,29.9) v1(33.12,15.72) v1(33.42,8.9) v1(33.42,7.42) v1(33.5,56.25) v1(33.5,54.75) v1(33.45,51.2) v1(33.5,10.75) v1(33.58,57.2) v1(33.65,39.25) v1(33.6,38.17) v1(33.8,24.65) v1(33.8,5.95) v1(33.85,30.2) v1(33.85,29.15) v1(34,48.83) v1(34.1,40.27) v1(34.1,26.57) v1(34.12,16.62) v1(34.12,13.75) v1(34.12,12.75) v1(34.15,11.43) v1(34.15,9.62) v1(34.17,8.12) v1(34.17,6.85) v1(34.5,55.75) v1(34.5,53.75) v1(34.58,57.2) v1(34.65,27.18) v1(34.65,26.12) v1(34.73,43.42) v1(35.42,10.9) v1(35.42,9.22) v1(35.42,7.38) v1(35.5,56.25) v1(35.5,54.75) v1(35.48,13.75) v1(35.48,12.75) v1(35.58,57.2) v1(35.58,48.48) v1(35.8,5.95) v1(35.85,37.4) v1(36.08,47.6) v1(36.1,46.58) v1(36.17,10.2) v1(36.17,8.28) v1(36.17,6.75) v1(36.5,55.75) v1(36.5,53.75) v1(36.58,57.2) v1(36.62,48.5) v1(36.67,43.4) v1(36.73,11.97) v1(36.85,47.55) v1(36.92,13.75) v1(36.95,16.7) v1(37.12,15.7) v1(37.2,46.55) v1(37.3,36.95) v1(37.42,9.53) v1(37.42,8.22) v1(37.42,6.7) v1(37.5,56.25) v1(37.5,54.75) v1(37.45,41.65) v1(37.45,10.88) v1(37.58,57.2) v1(37.58,51.17) v1(37.77,48.5) v1(37.75,13) v1(37.8,5.95) v1(37.92,47.58) v1(37.85,16.88) v1(38,24.2) v1(38.17,32.65) v1(38.25,15.72) v1(38.17,6.62) v1(38.33,46.55) v1(38.5,55.75) v1(38.5,53.75) v1(38.5,13.72) v1(38.5,10.75) v1(38.52,9.28) v1(38.58,57.2) v1(38.62,42.5) v1(38.6,38.3) v1(38.65,12.07) v1(38.67,40.25) v1(38.88,48.5) v1(38.92,36.1) v1(38.9,23.75) v1(39,30.18) v1(39.05,29) v1(39.3,47.58) v1(39.27,16.05) v1(39.42,10.18) v1(39.42,6.6) v1(39.5,56.25) v1(39.5,54.75) v1(39.48,29.5) v1(39.45,8.4) v1(39.58,57.2) v1(39.65,30.18) v1(39.8,46.55) v1(39.8,5.95) v1(39.92,43.38) v1(40.02,41.65) v1(40.15,9.1) v1(40.17,48.5) v1(40.23,35.48) v1(40.17,13.3) v1(40.17,12.12) v1(40.17,10.93) v1(40.17,7.33) v1(40.5,55.75) v1(40.5,53.75) v1(40.55,40.25) v1(40.58,57.2) v1(40.77,47.52) v1(40.9,42.5) v1(41.02,37.33) v1(41.1,51.23) v1(41.23,46.58) v1(41.23,24.15) v1(41.33,20.5) v1(41.42,12.2) v1(41.42,9.05) v1(41.42,7.35) v1(41.5,56.25) v1(41.5,54.75) v1(41.45,13.18) v1(41.45,10.4) v1(41.58,57.2) v1(41.62,22.98) v1(41.73,48.48) v1(41.7,40.25) v1(41.83,43.4) v1(41.8,5.95) v1(41.92,41.65) v1(42.15,47.48) v1(42.17,9.95) v1(42.17,8.15) v1(42.17,6.62) v1(42.4,13.15) v1(42.5,55.75) v1(42.5,53.75) v1(42.5,37.33) v1(42.48,14.22) v1(42.58,57.2) v1(42.77,11.1) v1(42.88,42.58) v1(43.02,23.68) v1(43.15,48.48) v1(43.12,46.58) v1(43.15,41.65) v1(43.08,40.25) v1(43.23,32.1) v1(43.2,18.45) v1(43.2,12.15) v1(43.27,36.6) v1(43.4,14.15) v1(43.42,8.18) v1(43.42,6.7) v1(43.5,56.25) v1(43.5,54.75) v1(43.55,24.05) v1(43.55,21.15) v1(43.55,20.15) v1(43.45,9.95) v1(43.58,57.2) v1(43.6,51.23) v1(43.67,43.38) v1(43.8,5.95) v1(44.02,47.48) v1(44.23,41.65) v1(44.33,12.65) v1(44.5,55.75) v1(44.5,53.75) v1(44.52,42.48) v1(44.58,57.2) v1(44.65,13.6) v1(44.8,11.32) v1(44.77,9.45) v1(44.77,7.7) v1(44.85,43.38) v1(44.9,21.15) v1(44.9,20.15) v1(45.02,48.48) v1(44.98,46.58) v1(45.35,32.1) v1(45.5,56.25) v1(45.5,54.75) v1(45.45,35.02) v1(45.45,6.95) v1(45.58,57.2) v1(45.62,12.03) v1(45.58,10.3) v1(45.83,47.4) v1(45.83,42.42) v1(45.77,8.38) v1(45.92,16.77) v1(46.15,37.98) v1(46.17,40.25) v1(46.3,13.6) v1(46.33,11.1) v1(46.35,21.02) v1(46.35,19.68) v1(46.5,55.75) v1(46.5,53.75) v1(46.5,46.2) v1(46.48,15.3) v1(46.58,57.2) v1(46.62,23.3) v1(46.58,8.78) v1(46.8,10) v1(46.88,48.45) v1(46.9,16.73) v1(47.12,31.45) v1(47.1,14) v1(47.1,12.25) v1(47.5,56.25) v1(47.5,54.75) v1(47.52,47.23) v1(47.45,33.62) v1(47.58,57.2) v1(47.58,37.95) v1(47.6,11.2) v1(47.58,8.78) v1(48.05,44.65) v1(48,40.25) v1(47.98,19.27) v1(47.98,16.82) v1(47.95,9.93) v1(48.2,46.08) v1(48.5,55.75) v1(48.5,53.75) v1(48.52,12.25) v1(48.58,57.2) v1(48.58,8.78) v1(48.73,18.9) v1(48.75,48.48) v1(48.83,47.15) v1(48.88,23.62) v1(48.95,9.85) v1(49.3,34.17) v1(49.33,11.45) v1(49.48,46.08) v1(49.55,22.95) v1(49.58,57.2) v1(49.58,51.25) v1(49.58,17.95) v1(49.58,16.52) v1(49.58,13.05) v1(49.58,8.78) v1(49.83,24.02) v1(50,56.25) v1(50,53.75) v1(50.23,27.95) v1(50.3,22.18) v1(50.3,12.3) v1(50.27,10.5) v1(50.42,48.48) v1(50.58,57.2) v1(50.62,29.4) v1(50.58,8.78) v1(50.88,17.38) v1(50.98,11.62) v1(51.08,14.35) v1(51.58,57.2) v1(51.58,8.78) v1(51.8,55.17) v1(51.75,30.1) v1(51.88,49.85) v1(52,53.75) v1(52.02,12.93) v1(52.23,48.48) v1(52.58,57.2) v1(52.58,8.78) v1(53,56.25) v1(53.33,14.35) v1(53.58,57.2) v1(53.58,8.78) v1(53.73,28.23) v1(54.45,55.17) v1(54.58,57.2) v1(54.65,14.72) v1(54.58,8.78) v1(55.1,49.83) v1(55.12,13.9) v1(55.2,52.52) v1(55.17,48.33) v1(55.42,30.3) v1(55.58,57.2) v1(55.58,8.78) v1(55.67,28.23) v1(55.75,26.23) v1(56,56.25) v1(55.98,54.15) v1(55.95,24.85) v1(56.58,57.2) v1(56.58,8.78) v1(56.77,28.25) v1(56.95,14.1) v1(57.12,26.25) v1(57.08,24.85) v1(57.2,30.3) v1(57.5,56.25) v1(57.55,24.15) v1(57.52,16.43) v1(57.5,12.75) v1(57.58,57.2) v1(57.65,27.15) v1(57.58,8.78) v1(57.67,25.65) v1(57.92,28.23) v1(57.98,15.12) v1(58.17,11.62) v1(58.42,53.67) v1(58.35,26.55) v1(58.35,24.85) v1(58.58,57.2) v1(58.58,8.78) v1(58.73,49.88) v1(58.75,21.43) v1(58.85,10.5) v1(59,56.25) v1(59.15,16.3) v1(59.35,14.6) v1(59.5,54.15) v1(59.58,57.2) v1(59.58,8.78) v1(59.8,11.22) v1(59.88,17.07) v1(60.3,53.35) v1(60.33,13.78) v1(60.45,26.38) v1(60.45,25.02) v1(60.52,15.78) v1(60.58,57.2) v1(60.65,28.82) v1(60.65,20.5) v1(60.65,19.2) v1(60.65,17.88) v1(60.58,8.78) v1(60.9,22.32) v1(61,56.25) v1(61.02,52.62) v1(60.95,25.7) v1(61,10.25) v1(61.27,54.15) v1(61.38,55.15) v1(61.42,14.88) v1(61.48,48.35) v1(61.58,57.2) v1(61.58,8.78) v1(61.7,28.38) v1(61.73,20.5) v1(61.92,24.43) v1(61.85,17.1) v1(61.95,53.23) v1(61.98,51.7) v1(61.95,26.27) v1(62.05,19.2) v1(62,11.25) v1(62.38,30.85) v1(62.55,55.15) v1(62.55,54.12) v1(62.58,57.2) v1(62.58,8.78) v1(62.8,28.82) v1(62.8,27.15) v1(62.8,21.27) v1(62.8,20.5) v1(63,56.25) v1(62.98,53.05) v1(62.95,16.4) v1(63,12.25) v1(63,10.25) v1(63.08,18.32) v1(63.58,57.2) v1(63.58,8.78) v1(63.77,49.95) v1(63.92,48.48) v1(63.98,19.23) v1(64,13.25) v1(64,11.25) v1(64.12,20.48) v1(64.15,28.8) v1(64.15,17.6) v1(64.47,53.1) v1(64.5,27.75) v1(64.5,25.75) v1(64.5,23.75) v1(64.5,21.75) v1(64.58,57.2) v1(64.58,30.85) v1(64.58,8.78) v1(64.67,51.25) v1(65,56.25) v1(65,55.25) v1(65,14.25) v1(65,12.25) v1(65,10.25) v1(65.1,48.48) v1(65.25,20.48) v1(65.28,18.73) v1(65.5,53.05) v1(65.5,28.75) v1(65.5,26.75) v1(65.5,24.75) v1(65.5,22.75) v1(65.58,57.2) v1(65.58,8.78) v1(65.83,30.85) v1(66,15.25) v1(66,13.25) v1(66,11.25) v1(66.25,48.48) v1(66.5,27.75) v1(66.5,25.75) v1(66.5,23.75) v1(66.53,21.77) v1(66.58,57.2) v1(66.58,8.78) v1(66.9,37.52) v1(66.9,36.33) v1(66.9,33.88) v1(67,56.25) v1(67,49.95) v1(67,20.45) v1(67,16.25) v1(67,14.25) v1(67,12.25) v1(67,10.25) v1(67.12,45.52) v1(67.1,44.45) v1(67.25,53.05) v1(67.25,51.25) v1(67.15,46.6) v1(67.33,48.48) v1(67.5,55.25) v1(67.5,28.75) v1(67.5,26.75) v1(67.5,24.75) v1(67.58,57.2) v1(67.62,36.8) v1(67.62,35.62) v1(67.62,33.55) v1(67.62,32.08) v1(67.62,30.85) v1(67.62,22.88) v1(67.58,8.78) v1(67.97,47.55) v1(68,17.25) v1(68,15.25) v1(68,13.25) v1(68,11.25) v1(68.12,38.12) v1(68.25,53.17) v1(68.53,48.48) v1(68.58,57.2) v1(68.62,42.52) v1(68.58,8.78) v1(68.65,46.7) v1(68.67,45.9) v1(68.7,22.15) v1(68.92,36.77) v1(68.92,32.8) v1(68.92,28.82) v1(68.92,27.35) v1(68.92,25.52) v1(69,56.25) v1(68.97,37.98) v1(68.95,35.33) v1(68.95,30.85) v1(68.95,23.68) v1(69,18.25) v1(69,16.25) v1(69,14.25) v1(69,12.25) v1(69,10.25) v1(69.42,47.6) v1(69.58,57.2) v1(69.58,53.27) v1(69.58,49.95) v1(69.58,8.78) v1(70,55.25) v1(70,19.25) v1(70,17.25) v1(70,15.25) v1(70,13.25) v1(70,11.25) v1(70.08,45.45) v1(70.25,42.1) v1(70.25,38.12) v1(70.25,36.45) v1(70.35,34) v1(70.33,30.85) v1(70.38,46.65) v1(70.5,28.75) v1(70.5,26.75) v1(70.5,24.75) v1(70.5,22.75) v1(70.58,57.2) v1(70.58,53.08) v1(70.58,51.25) v1(70.58,49.95) v1(70.58,8.78) v1(71,56.25) v1(70.97,45.85) v1(70.97,42.8) v1(71,18.25) v1(71,16.25) v1(71,14.25) v1(71,12.25) v1(71,10.25) v1(71.28,37.05) v1(71.3,27.75) v1(71.3,25.75) v1(71.3,23.75) v1(71.53,42.1) v1(71.45,33.95) v1(71.45,33) v1(71.5,20.75) v1(71.58,57.2) v1(71.58,8.78) v1(71.65,35.58) v1(71.83,38.12) v1(72,19.25) v1(72,17.25) v1(72,15.25) v1(72,13.25) v1(72,11.25) v1(72.15,42.8) v1(72.33,53.12) v1(72.42,32.27) v1(72.5,55.25) v1(72.5,51.25) v1(72.5,34.75) v1(72.5,21.75) v1(72.58,57.2) v1(72.58,8.78) v1(72.92,48.27) v1(72.88,45.02) v1(72.88,43.62) v1(72.88,36.83) v1(73,56.25) v1(72.95,42.1) v1(73,34.25) v1(73,18.25) v1(73,16.25) v1(73,14.25) v1(73,12.25) v1(73,10.25) v1(73.15,31.23) v1(73.15,30.1) v1(73.33,53.27) v1(73.5,28.75) v1(73.5,26.75) v1(73.5,24.75) v1(73.5,22.75) v1(73.5,20.75) v1(73.58,57.2) v1(73.58,8.78) v1(74.03,37.98) v1(74,36.25) v1(74,35.25) v1(74,33.25) v1(74,31.25) v1(74,19.25) v1(74,17.25) v1(74,15.25) v1(74,13.25) v1(74,11.25) v1(74.5,27.75) v1(74.5,25.75) v1(74.5,23.75) v1(74.5,21.75) v1(74.58,57.2) v1(74.58,8.78) v1(74.8,51.25) v1(74.92,12.28) v1(75,56.25) v1(75,55.25) v1(75.05,38.98) v1(74.95,37.48) v1(75,34.25) v1(75,32.25) v1(75,30.25) v1(75,18.25) v1(75,16.25) v1(75,14.25) v1(75,10.25) v1(75.3,53.33) v1(75.5,48.62) v1(75.5,47.5) v1(75.5,26.75) v1(75.5,24.75) v1(75.5,22.75) v1(75.5,20.75) v1(75.58,57.2) v1(75.58,8.78) v1(75.72,51.25) v1(76,33.25) v1(76,31.25) v1(76,29.25) v1(76,19.25) v1(76,17.25) v1(76,15.25) v1(76.08,39.98) v1(76.08,38.98) v1(76.5,25.75) v1(76.5,23.75) v1(76.5,21.75) v1(76.58,57.2) v1(76.92,47.88) v1(76.92,46.98) v1(76.92,45.62) v1(76.92,44.48) v1(76.92,43.25) v1(76.92,41.42) v1(77,56.25) v1(77,32.25) v1(77,30.25) v1(77,28.25) v1(77,18.25) v1(77,16.25) v1(77,14.28) v1(77.42,53.05) v1(77.42,51.25) v1(77.5,55.25) v1(77.5,26.55) v1(77.5,24.75) v1(77.5,22.75) v1(77.5,20.75) v1(77.58,57.2) v1(77.92,46.92) v1(77.92,45.65) v1(77.92,44.48) v1(77.92,43.25) v1(77.92,42.27) v1(77.92,40.45) v1(77.97,48.65) v1(78,33.25) v1(78,31.25) v1(78,29.25) v1(78,19.25) v1(78,17.25) v1(78,15.25) v1(78.42,53.17) v1(78.5,25.75) v1(78.5,23.75) v1(78.5,21.75) v1(78.58,57.2) v1(78.8,47.83) v1(79,56.25) v1(79,46.75) v1(79,44.75) v1(79,42.75) v1(79.03,41.17) v1(78.95,39.42) v1(79,32.25) v1(79,30.25) v1(79,28.25) v1(79,18.25) v1(79,16.25) v1(79,14.25) v1(79.22,19.23) v1(79.5,26.55) v1(79.5,24.75) v1(79.5,22.75) v1(79.5,20.75) v1(79.58,57.2) v1(79.58,8.78) v1(79.9,48.92) v1(79.97,53.02) v1(79.97,51.25) v1(80,47.75) v1(80,45.75) v1(80,43.75) v1(80,41.75) v1(80,33.25) v1(80,31.25) v1(80,29.25) v1(80,17.25) v1(80,15.25) v1(80.17,18.25) v1(80.17,13.25) v1(80.3,54.17) v1(80.5,55.25) v1(80.5,25.75) v1(80.5,23.75) v1(80.5,21.75) v1(80.5,19.75) v1(80.58,57.2) v1(80.62,39.55) v1(80.6,35.17) v1(80.58,8.78) v1(80.67,37.27) v1(80.9,49.95) v1(81,56.25) v1(81,54.25) v1(80.97,53.1) v1(81,52.25) v1(80.97,51.25) v1(81,48.75) v1(81,46.75) v1(81,44.75) v1(81,42.75) v1(81,40.75) v1(81,38.25) v1(81,36.25) v1(81,34.25) v1(81,32.25) v1(81,30.25) v1(81,28.25) v1(81,14.25) v1(81,12.25) v1(81,10.25) v1(81.5,26.55) v1(81.5,24.75) v1(81.5,22.75) v1(81.5,20.75) v1(81.5,18.75) v1(81.5,16.75) v1(81.58,57.2) v1(81.58,8.78) v1(82,55.25) v1(82,53.25) v1(82,51.25) v1(82,49.75) v1(82,47.75) v1(82,45.75) v1(82,43.75) v1(82,41.75) v1(82,39.75) v1(82,37.25) v1(82,35.25) v1(82,33.25) v1(82,31.25) v1(82,29.25) v1(82,15.25) v1(82,13.25) v1(82,11.25) v1(82.5,25.75) v1(82.5,23.75) v1(82.5,21.75) v1(82.5,19.75) v1(82.5,17.75) v1(82.58,57.2) v1(82.58,8.78) v1(82.9,15.55) v1(83,56.25) v1(83,54.25) v1(83,52.25) v1(83,48.75) v1(83,46.75) v1(83,44.75) v1(83,42.75) v1(83,40.75) v1(83,38.25) v1(83,36.25) v1(83,34.25) v1(83,32.25) v1(83,30.25) v1(83,28.25) v1(83,14.25) v1(83,12.25) v1(83,10.25) v1(83.5,26.55) v1(83.5,24.75) v1(83.5,22.75) v1(83.5,20.75) v1(83.5,18.75) v1(83.5,16.75) v1(83.58,57.2) v1(83.58,8.78) v1(84,55.25) v1(84,53.25) v1(84,51.25) v1(84,49.75) v1(84,47.75) v1(84,45.75) v1(84,43.75) v1(84,41.75) v1(84,39.75) v1(84,37.25) v1(84,35.25) v1(84,33.25) v1(84,31.25) v1(84,29.25) v1(84,14.75) v1(84,13.25) v1(84,11.25) v1(84.5,25.75) v1(84.5,23.75) v1(84.5,21.75) v1(84.5,19.75) v1(84.5,17.75) v1(84.58,57.2) v1(84.58,8.78) v1(84.67,16.15) v1(85,56.25) v1(85,54.25) v1(85,52.25) v1(85,48.75) v1(85,46.75) v1(85,44.75) v1(85,42.75) v1(85,40.75) v1(85,38.25) v1(85,36.25) v1(85,34.25) v1(85,32.25) v1(85,30.25) v1(85,28.25) v1(85,14.25) v1(85,12.25) v1(85,10.25) v1(85.5,51.25) v1(85.5,49.75) v1(85.5,39.75) v1(85.5,26.55) v1(85.5,24.75) v1(85.5,22.75) v1(85.5,20.75) v1(85.5,18.75) v1(85.5,16.75) v1(85.58,57.2) v1(85.58,8.78) v1(85.92,14.53) v1(86,55.25) v1(86,53.25) v1(86,47.75) v1(86,45.75) v1(86,43.75) v1(86,41.75) v1(86,37.25) v1(86,35.25) v1(86,33.25) v1(86,31.25) v1(86,29.25) v1(86,13.25) v1(86,11.25) v1(86.5,25.75) v1(86.5,23.75) v1(86.5,21.75) v1(86.5,19.75) v1(86.5,17.75) v1(86.58,57.2) v1(86.58,8.78) v1(87,56.25) v1(87,54.25) v1(87,52.25) v1(87,48.75) v1(87,46.75) v1(87,44.75) v1(87,42.75) v1(87,40.75) v1(87,36.25) v1(87,34.25) v1(87,32.25) v1(87,30.25) v1(87,12.25) v1(87,10.25) v1(87.33,51.42) v1(87.3,49.7) v1(87.28,39.73) v1(87.3,38.23) v1(87.3,28.02) v1(87.28,26.38) v1(87.33,16.38) v1(87.33,14.65) v1(87.5,24.75) v1(87.5,22.75) v1(87.5,20.75) v1(87.5,18.75) v1(87.58,57.2) v1(87.58,8.78) v1(88,55.25) v1(88,53.25) v1(88,48.75) v1(88,47.75) v1(88,45.75) v1(88,43.75) v1(88,41.75) v1(88,37.25) v1(88,35.25) v1(88,33.25) v1(88,31.25) v1(88,29.25) v1(88,13.25) v1(88,11.25) v1(88.5,25.75) v1(88.5,23.75) v1(88.5,21.75) v1(88.5,19.75) v1(88.5,17.75) v1(88.58,57.2) v1(88.58,8.78) v1(89,52.25) v1(89,48.75) v1(89,46.75) v1(89,44.75) v1(89,42.75) v1(89,40.75) v1(89,38.25) v1(89,36.25) v1(89,34.25) v1(89,32.25) v1(89,30.25) v1(89,12.25) v1(89,10.25) v1(89.08,51.25) v1(89.08,49.95) v1(89.08,39.55) v1(89.1,27.85) v1(89.08,26.55) v1(89.08,16.15) v1(89.08,14.85) v1(89.5,37.25) v1(89.5,24.75) v1(89.5,22.75) v1(89.5,20.75) v1(89.5,18.75) v1(89.58,57.2) v1(89.58,8.78) v1(89.92,29.27) v1(90,53.25) v1(90,45.75) v1(90,43.75) v1(90,41.75) v1(90,33.25) v1(90,31.25) v1(90,13.25) v1(90.3,17.95) v1(90.5,21.75) v1(90.5,19.75) v1(90.58,57.2) v1(90.6,47.85) v1(90.58,8.78) v1(91,44.75) v1(91,42.75) v1(91,34.25) v1(91,32.25) v1(90.95,30.3) v1(91.5,22.75) v1(91.5,20.75) v1(91.58,57.2) v1(91.58,8.78) v1(92,56.25) v1(92,54.75) v1(92,45.75) v1(92,43.75) v1(92,33.25) v1(92,31.35) v1(92.25,19.9) v1(92.5,21.75) v1(92.58,57.2) v1(92.58,8.78) v1(93,55.75) v1(93,44.75) v1(93,10.75) v1(93.5,56.25) v1(93.58,57.2) v1(93.58,8.78) v1(94,33.25) v1(94,21.25) v1(94,9.75) v1(94.58,57.2) v1(94.58,8.78) v1(95,44.75) v1(95.5,56.25) v1(95.58,57.2) v1(95.58,8.78) v1(96,33.25) v1(96,21.25) v1(96,9.75) v1(96.58,57.2) v1(96.58,8.78) v1(97,44.75) v1(97.5,56.25) v1(97.58,57.2) v1(97.58,8.78) v1(98,33.25) v1(98,21.25) v1(98,9.75) v1(98.58,57.2) v1(98.58,8.78) v1(99,44.75) v1(99.5,56.25) v1(99.58,57.2) v1(99.58,8.78) v1(100,33.25) v1(100,21.25) v1(100,9.75) v1(100.58,57.2) v1(100.58,8.78) v1(101,44.75) v1(101.5,56.25) v1(101.58,57.2) v1(101.58,8.78) v1(102,33.25) v1(102,21.25) v1(102,9.75) v1(102.58,57.2) v1(102.58,8.78) v1(103,44.75) v1(103.5,56.25) v1(103.58,57.2) v1(103.58,8.78) v1(104,33.25) v1(104,21.25) v1(104,9.75) v1(104.5,55.25) v1(104.58,57.2) v1(104.58,8.78) v1(105,56.25) v1(105,54.25) v1(105,52.25) v1(105,50.25) v1(105,48.25) v1(105,46.25) v1(105,44.25) v1(105,42.25) v1(105,40.25) v1(105,38.25) v1(105,36.25) v1(105,34.25) v1(105,32.25) v1(105,30.25) v1(105,28.25) v1(105,26.25) v1(105,24.25) v1(105,22.25) v1(105,20.25) v1(105,18.25) v1(105,16.25) v1(105,14.25) v1(105,12.25) v1(105,10.25) v1(105.58,57.2) v1(105.58,8.78) v1(106,55.25) v1(106,53.25) v1(106,51.25) v1(106,49.25) v1(106,47.25) v1(106,45.25) v1(106,43.25) v1(106,41.25) v1(106,39.25) v1(106,37.25) v1(106,35.25) v1(106,33.25) v1(106,31.25) v1(106,29.25) v1(106,27.25) v1(106,25.25) v1(106,23.25) v1(106,21.25) v1(106,19.25) v1(106,17.25) v1(106,15.25) v1(106,13.25) v1(106,11.25) v1(106.58,57.2) v1(106.58,8.78) v1(107,56.25) v1(107,54.25) v1(107,52.25) v1(107,50.25) v1(107,48.25) v1(107,46.25) v1(107,44.25) v1(107,42.25) v1(107,40.25) v1(107,38.25) v1(107,36.25) v1(107,34.25) v1(107,32.25) v1(107,30.25) v1(107,28.25) v1(107,26.25) v1(107,24.25) v1(107,22.25) v1(107,20.25) v1(107,18.25) v1(107,16.25) v1(107,14.25) v1(107,12.25) v1(107,10.25) v1(107.58,57.2) v1(107.58,8.78) v1(108,55.25) v1(108,53.25) v1(108,51.25) v1(108,49.25) v1(108,47.25) v1(108,45.25) v1(108,43.25) v1(108,41.25) v1(108,39.25) v1(108,37.25) v1(108,35.25) v1(108,33.25) v1(108,31.25) v1(108,29.25) v1(108,27.25) v1(108,25.25) v1(108,23.25) v1(108,21.25) v1(108,19.25) v1(108,17.25) v1(108,15.25) v1(108,13.25) v1(108,11.25) v1(108.58,57.2) v1(108.58,8.78) v1(109,56.25) v1(109,54.25) v1(109,52.25) v1(109,50.25) v1(109,48.25) v1(109,46.25) v1(109,44.25) v1(109,42.25) v1(109,40.25) v1(109,38.25) v1(109,36.25) v1(109,34.25) v1(109,32.25) v1(109,30.25) v1(109,28.25) v1(109,26.25) v1(109,24.25) v1(109,22.25) v1(109,20.25) v1(109,18.25) v1(109,16.25) v1(109,14.25) v1(109,12.25) v1(109,10.25) v1(109.58,57.2) v1(109.58,8.78) v1(110,55.25) v1(110,53.25) v1(110,51.25) v1(110,49.25) v1(110,47.25) v1(110,45.25) v1(110,43.25) v1(110,41.25) v1(110,39.25) v1(110,37.25) v1(110,35.25) v1(110,33.25) v1(110,31.25) v1(110,29.25) v1(110,27.25) v1(110,25.25) v1(110,23.25) v1(110,21.25) v1(110,19.25) v1(110,17.25) v1(110,15.25) v1(110,13.25) v1(110,11.25) v1(110.58,57.2) v1(110.58,8.78) v1(111,56.25) v1(111,54.25) v1(111,52.25) v1(111,50.25) v1(111,48.25) v1(111,46.25) v1(111,44.25) v1(111,42.25) v1(111,40.25) v1(111,38.25) v1(111,36.25) v1(111,34.25) v1(111,32.25) v1(111,30.25) v1(111,28.25) v1(111,26.25) v1(111,24.25) v1(111,22.25) v1(111,20.25) v1(111,18.25) v1(111,16.25) v1(111,14.25) v1(111,12.25) v1(111,10.25) v1(111.58,57.2) v1(111.58,8.78) v1(112.5,57.2) v1(112.5,55.9) v1(112.5,54.9) v1(112.5,53.9) v1(112.5,52.9) v1(112.5,51.9) v1(112.5,50.9) v1(112.5,49.9) v1(112.5,48.9) v1(112.5,47.9) v1(112.5,46.9) v1(112.5,45.9) v1(112.5,44.9) v1(112.5,43.9) v1(112.5,42.9) v1(112.5,41.9) v1(112.5,40.9) v1(112.5,39.9) v1(112.5,38.9) v1(112.5,37.9) v1(112.5,36.9) v1(112.5,35.9) v1(112.5,34.9) v1(112.5,33.9) v1(112.5,32.9) v1(112.5,31.9) v1(112.5,30.9) v1(112.5,29.9) v1(112.5,28.9) v1(112.5,27.9) v1(112.5,26.9) v1(112.5,25.9) v1(112.5,24.9) v1(112.5,23.9) v1(112.5,22.9) v1(112.5,21.9) v1(112.5,20.9) v1(112.5,19.9) v1(112.5,18.9) v1(112.5,17.9) v1(112.5,16.9) v1(112.5,15.9) v1(112.5,14.9) v1(112.5,13.9) v1(112.5,12.9) v1(112.5,11.9) v1(112.5,10.9) v1(112.5,9.9) v1(112.5,8.78) v2(20.2,22.25) v2(20.2,20.57) v2(20.2,18.9) v2(21.04,21.41) v2(21.04,19.74) v2(21.88,22.25) v2(21.88,20.57) v2(21.88,18.9) v2(22.71,21.41) v2(22.71,19.74) v2(23.55,22.25) v2(23.55,20.57) v2(23.55,18.9) v2(32.62,22.38) v2(32.62,20.7) v2(32.62,19.02) v2(33.46,21.54) v2(33.46,19.86) v2(34.3,22.38) v2(34.3,20.7) v2(34.3,19.02) v2(35.14,21.54) v2(35.14,19.86) v2(35.98,22.38) v2(35.98,20.7) v2(35.98,19.02) v2(42.05,29.77) v2(42.05,28.1) v2(42.05,26.43) v2(42.89,28.94) v2(42.89,27.26) v2(43.73,29.77) v2(43.73,28.1) v2(43.73,26.43) v2(44.56,28.94) v2(44.56,27.26) v2(45.4,29.77) v2(45.4,28.1) v2(45.4,26.43) v2(52.62,22.52) v2(52.62,20.85) v2(52.62,19.18) v2(53.46,21.69) v2(53.46,20.01) v2(54.3,22.52) v2(54.3,20.85) v2(54.3,19.18) v2(55.14,21.69) v2(55.14,20.01) v2(55.98,22.52) v2(55.98,20.85) v2(55.98,19.18)
